# Altium PCB PowerBoard.PcbDoc (part 1 of 2)
Units mm, origin at the board's own origin, x right, y up, seen from the top; angles counter-clockwise.
Board outline 45 x 35 mm, 8 copper layers (Top Layer, Int1 (PGND), int2 (PWR_MOT), int3 (ALIM_MOT), int4 (+3.3VD), int5 (+3.3VA), Int6 (GNDA), Bottom Layer), stack 1.733 mm thick; 96 components, 64 nets, 341 pads, 448 vias.
Unrouted connection lines stored in the file: 117.
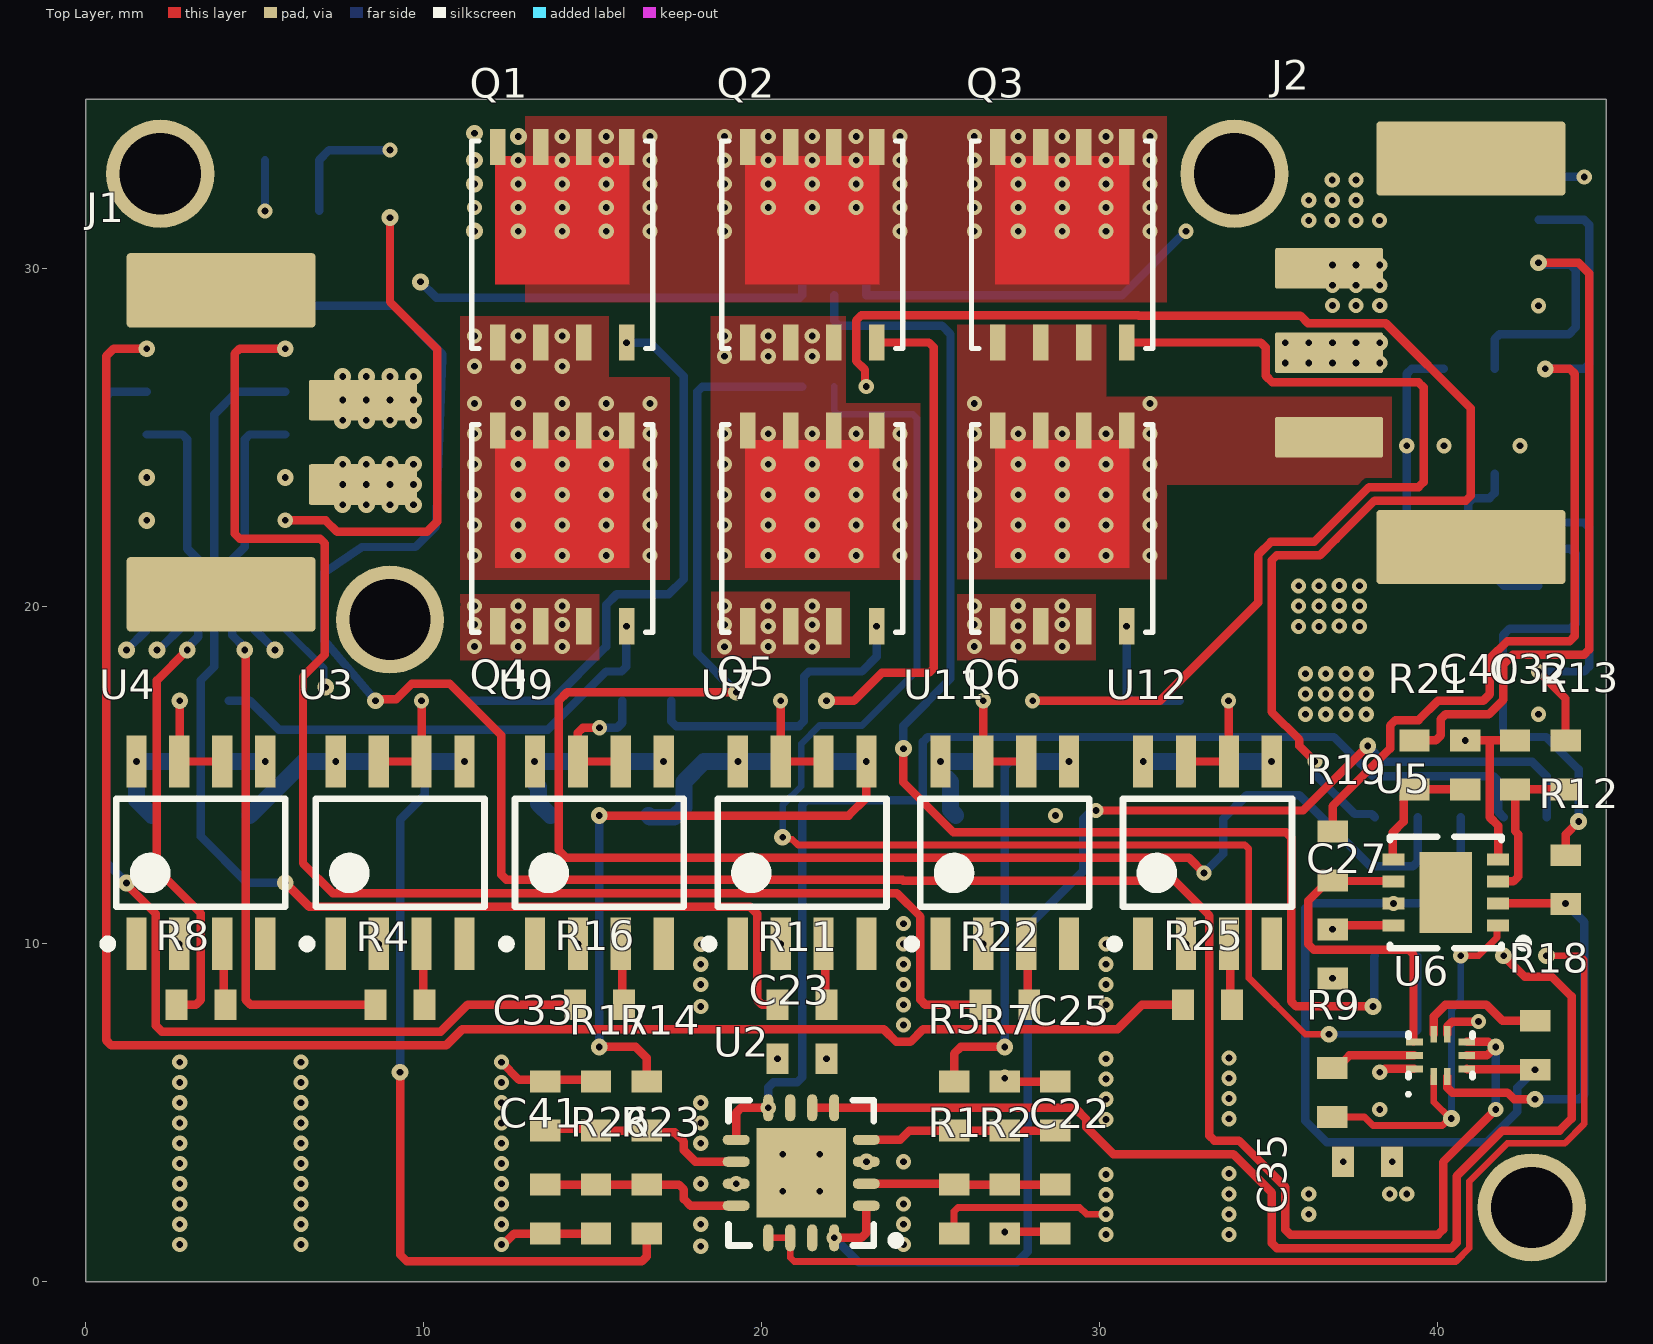
[diagram p0: Top Layer view]
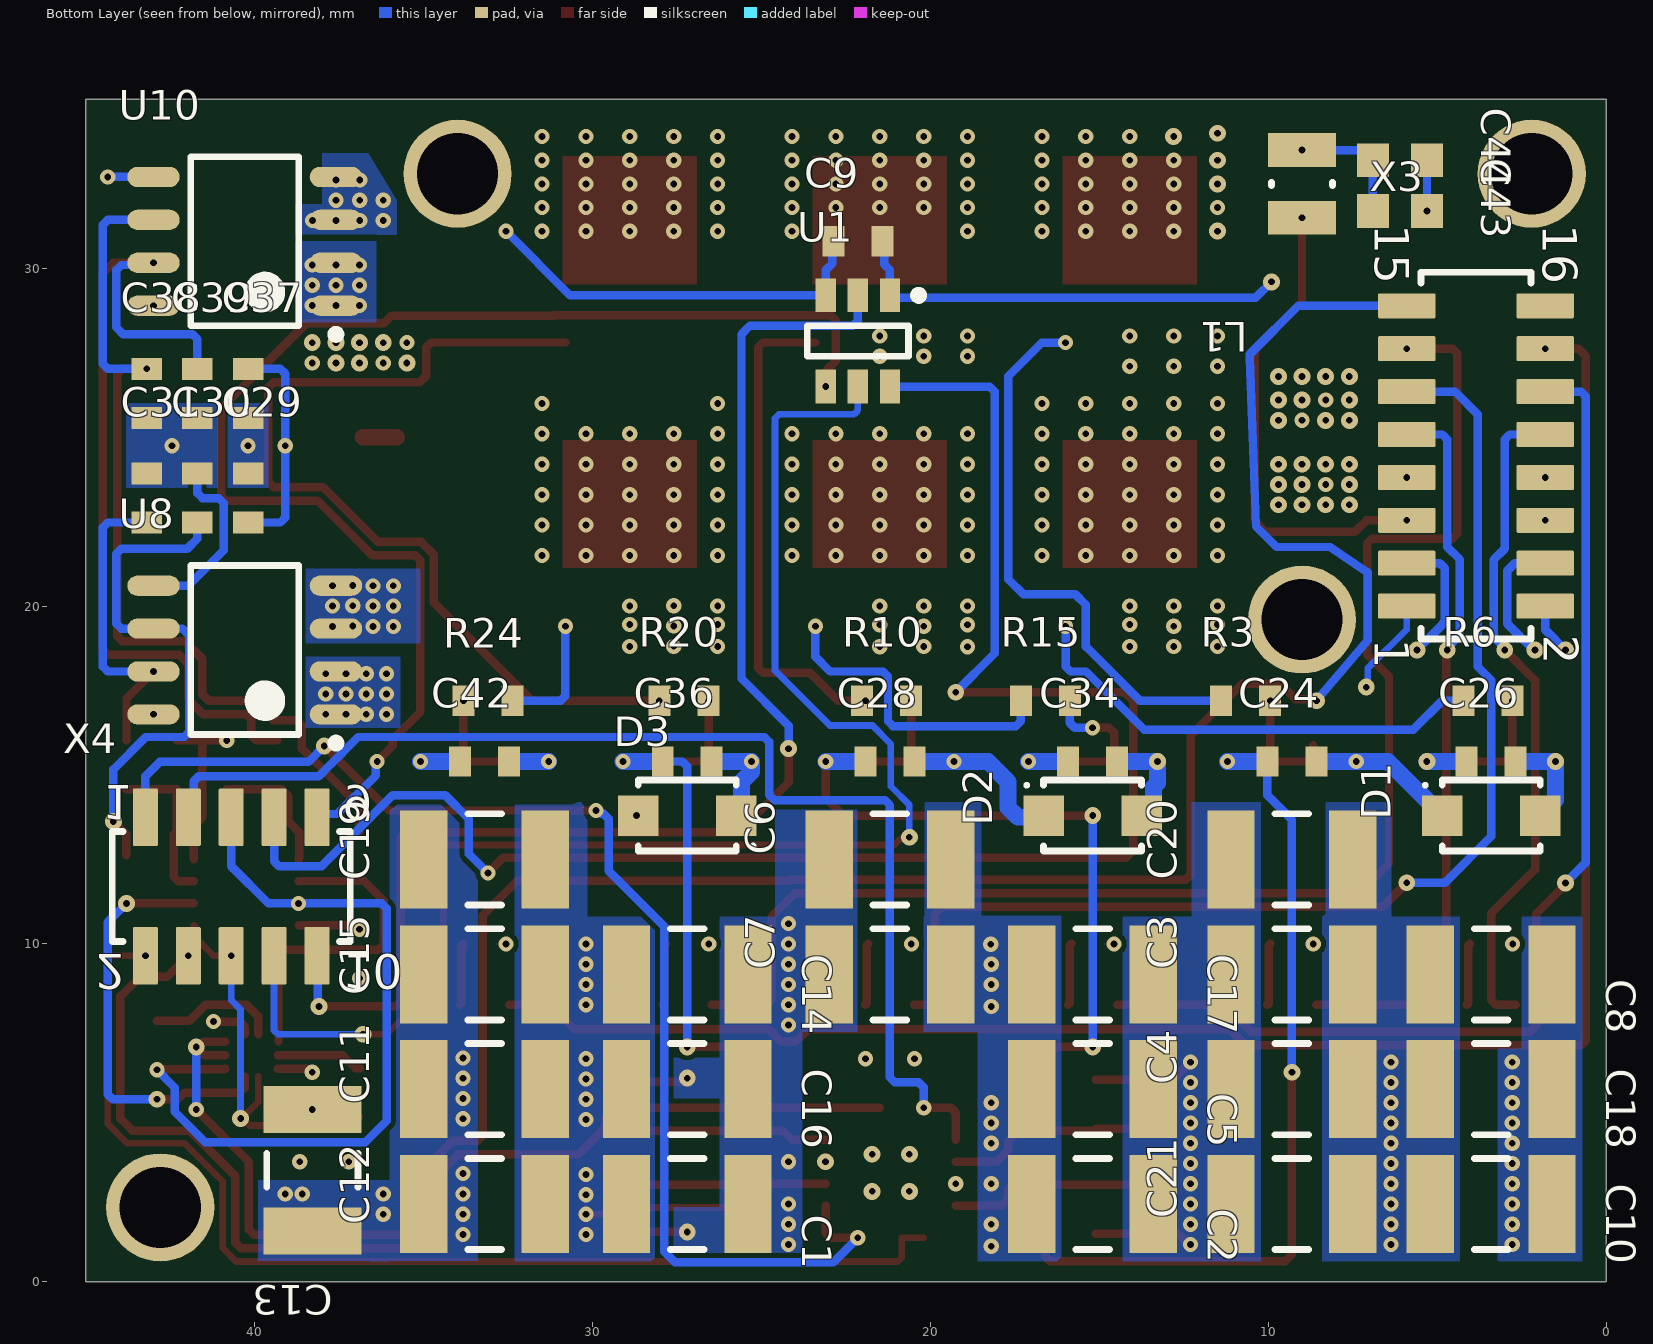
[diagram p1: Bottom Layer view, seen from below]
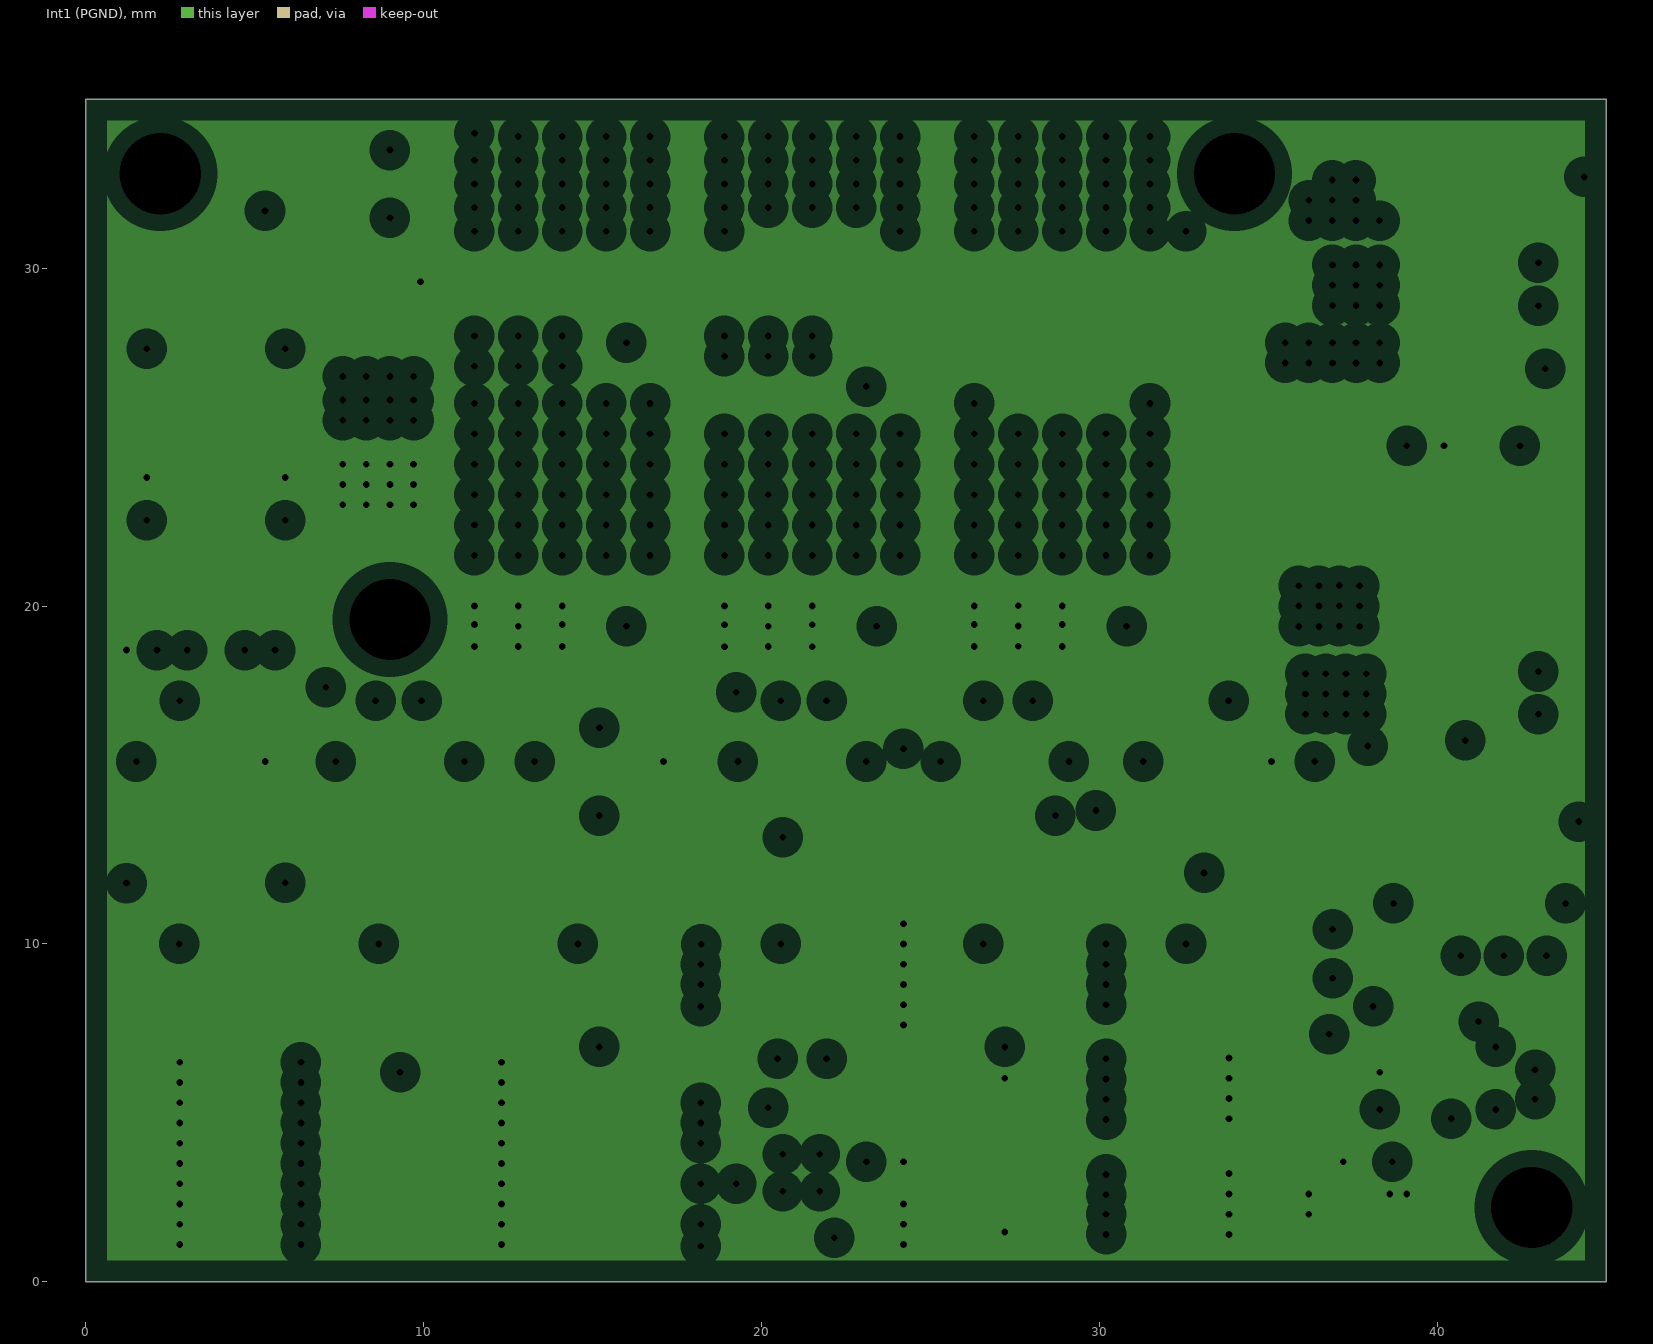
[diagram p2: Int1 (PGND), clearances drawn from the general rule]
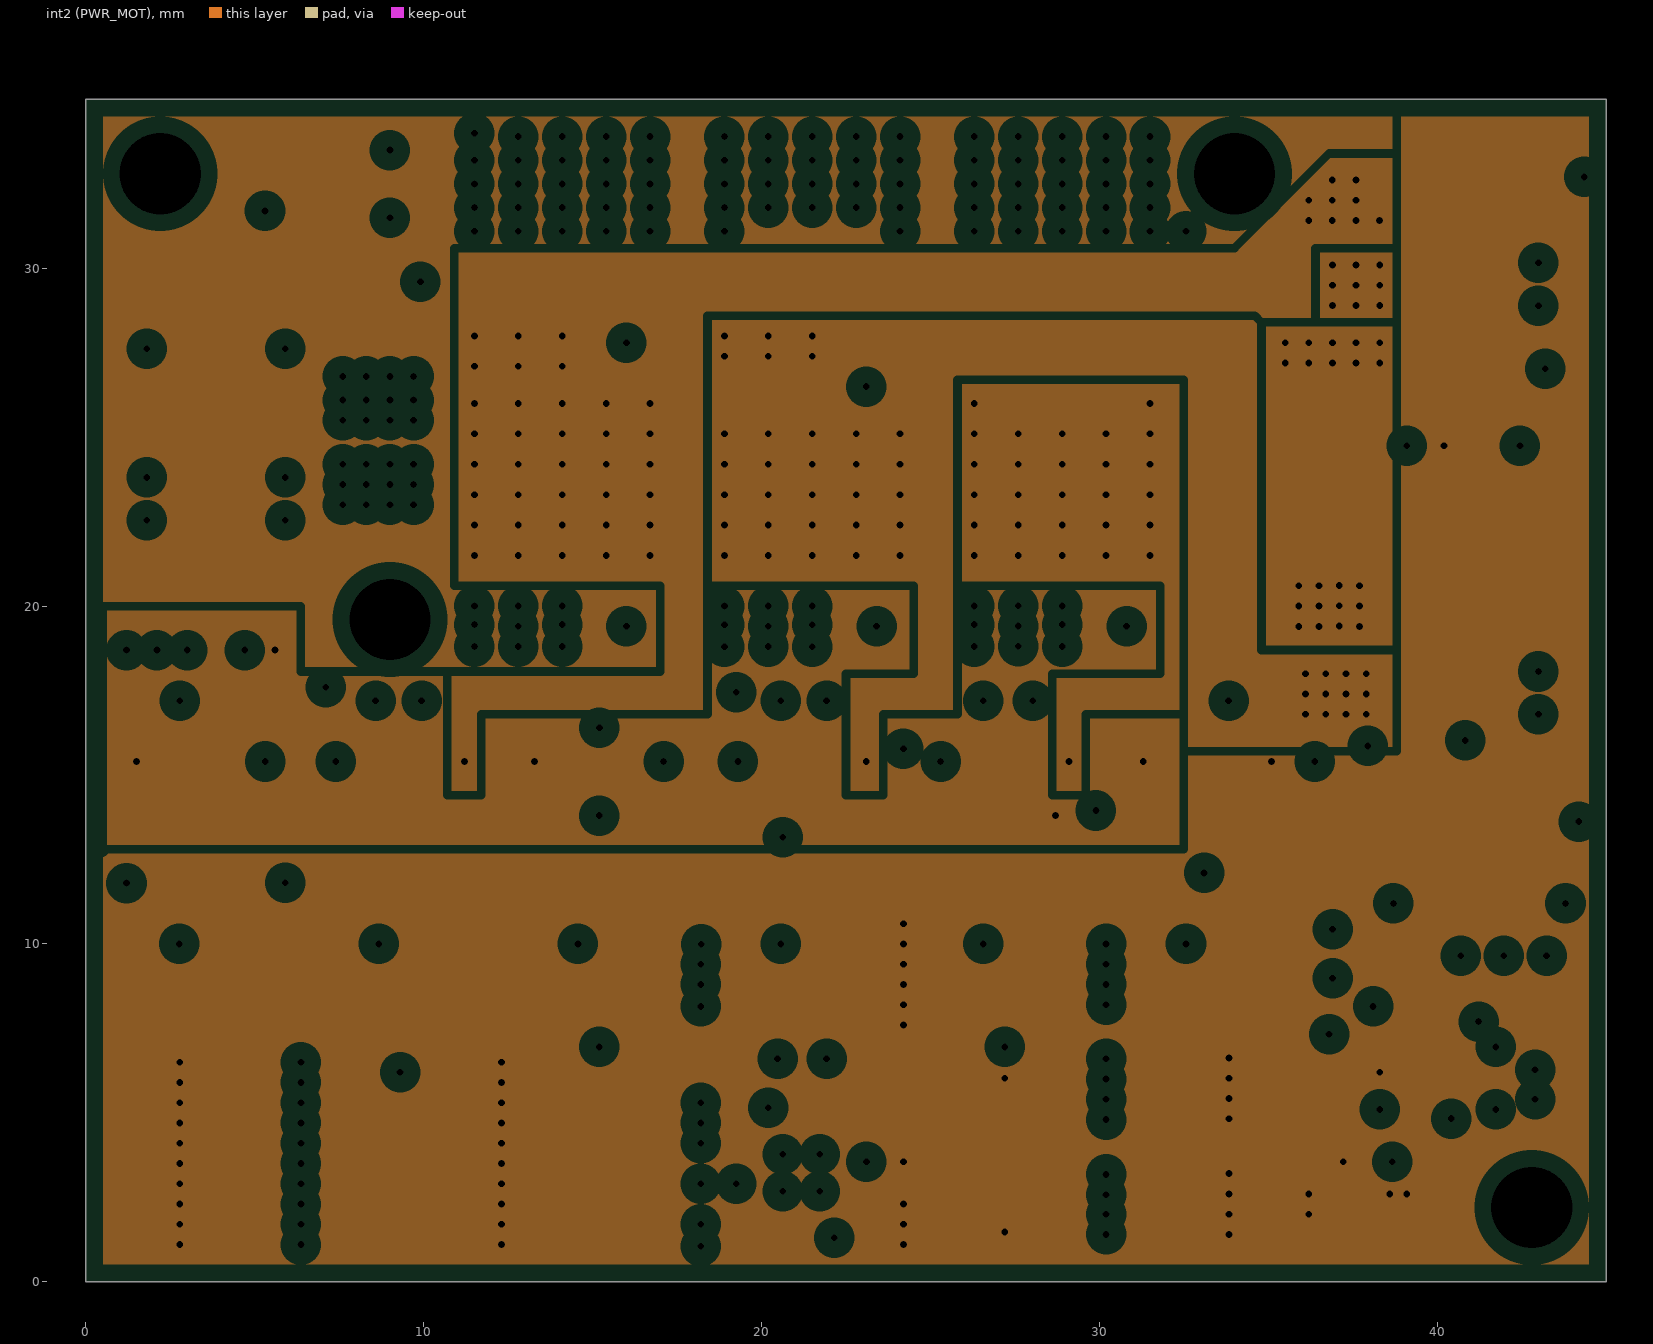
[diagram p3: int2 (PWR_MOT), clearances drawn from the general rule]
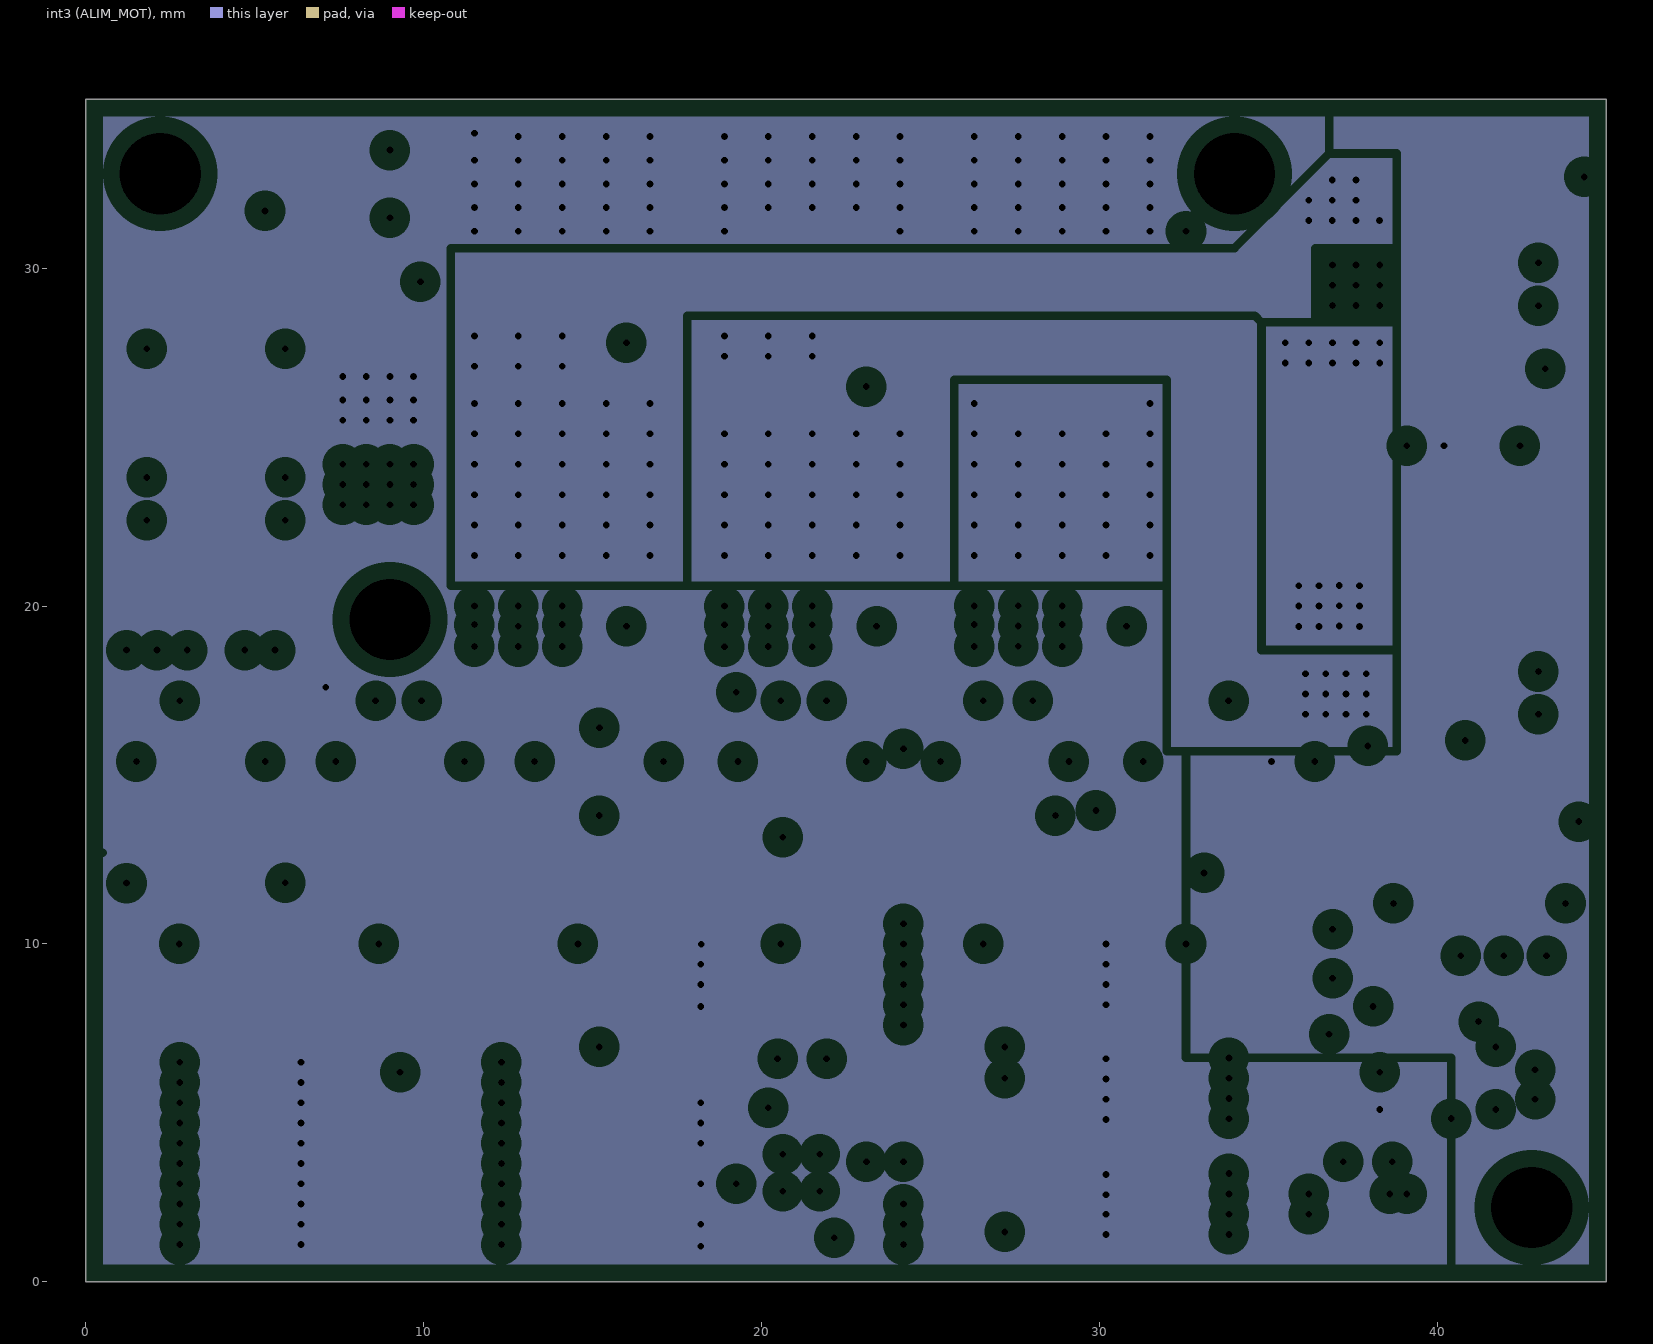
[diagram p4: int3 (ALIM_MOT), clearances drawn from the general rule]
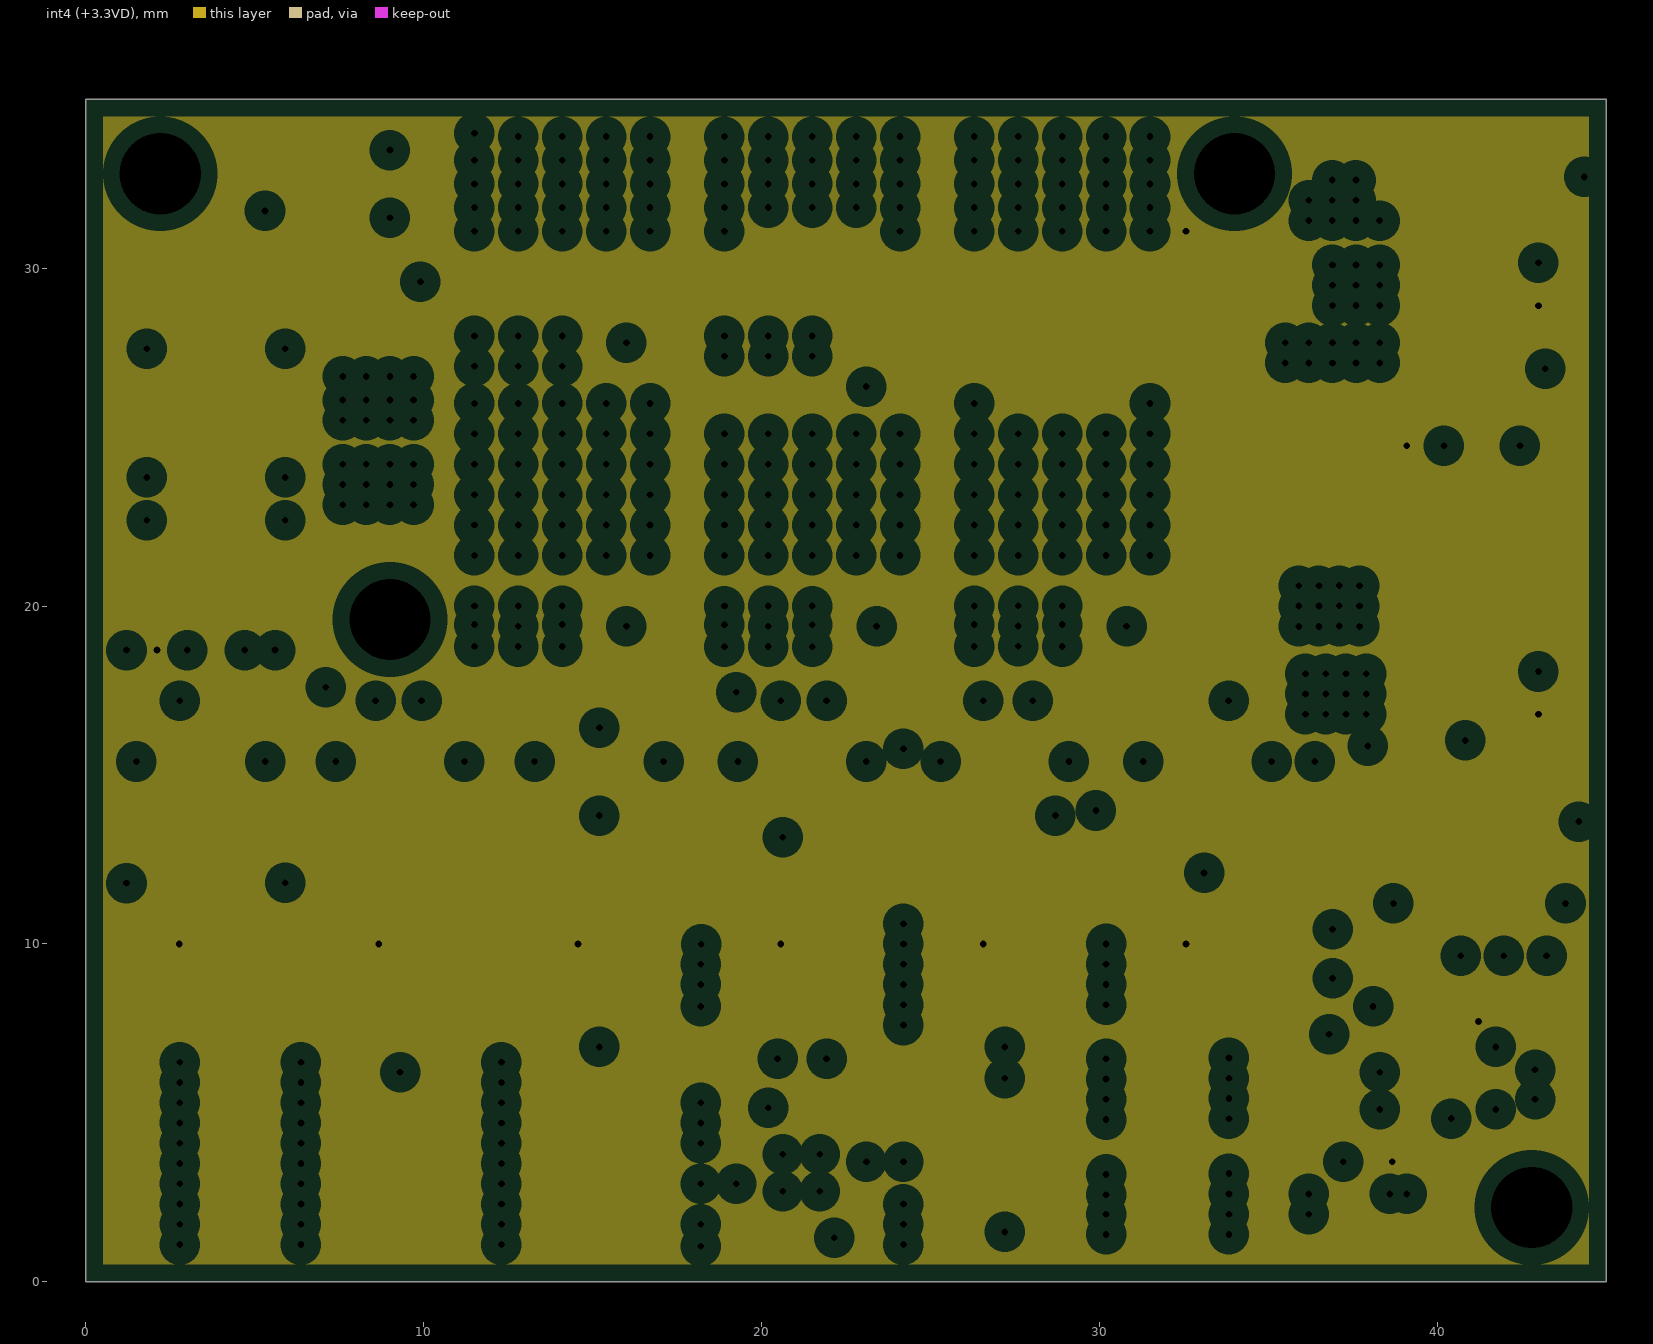
[diagram p5: int4 (+3.3VD), clearances drawn from the general rule]
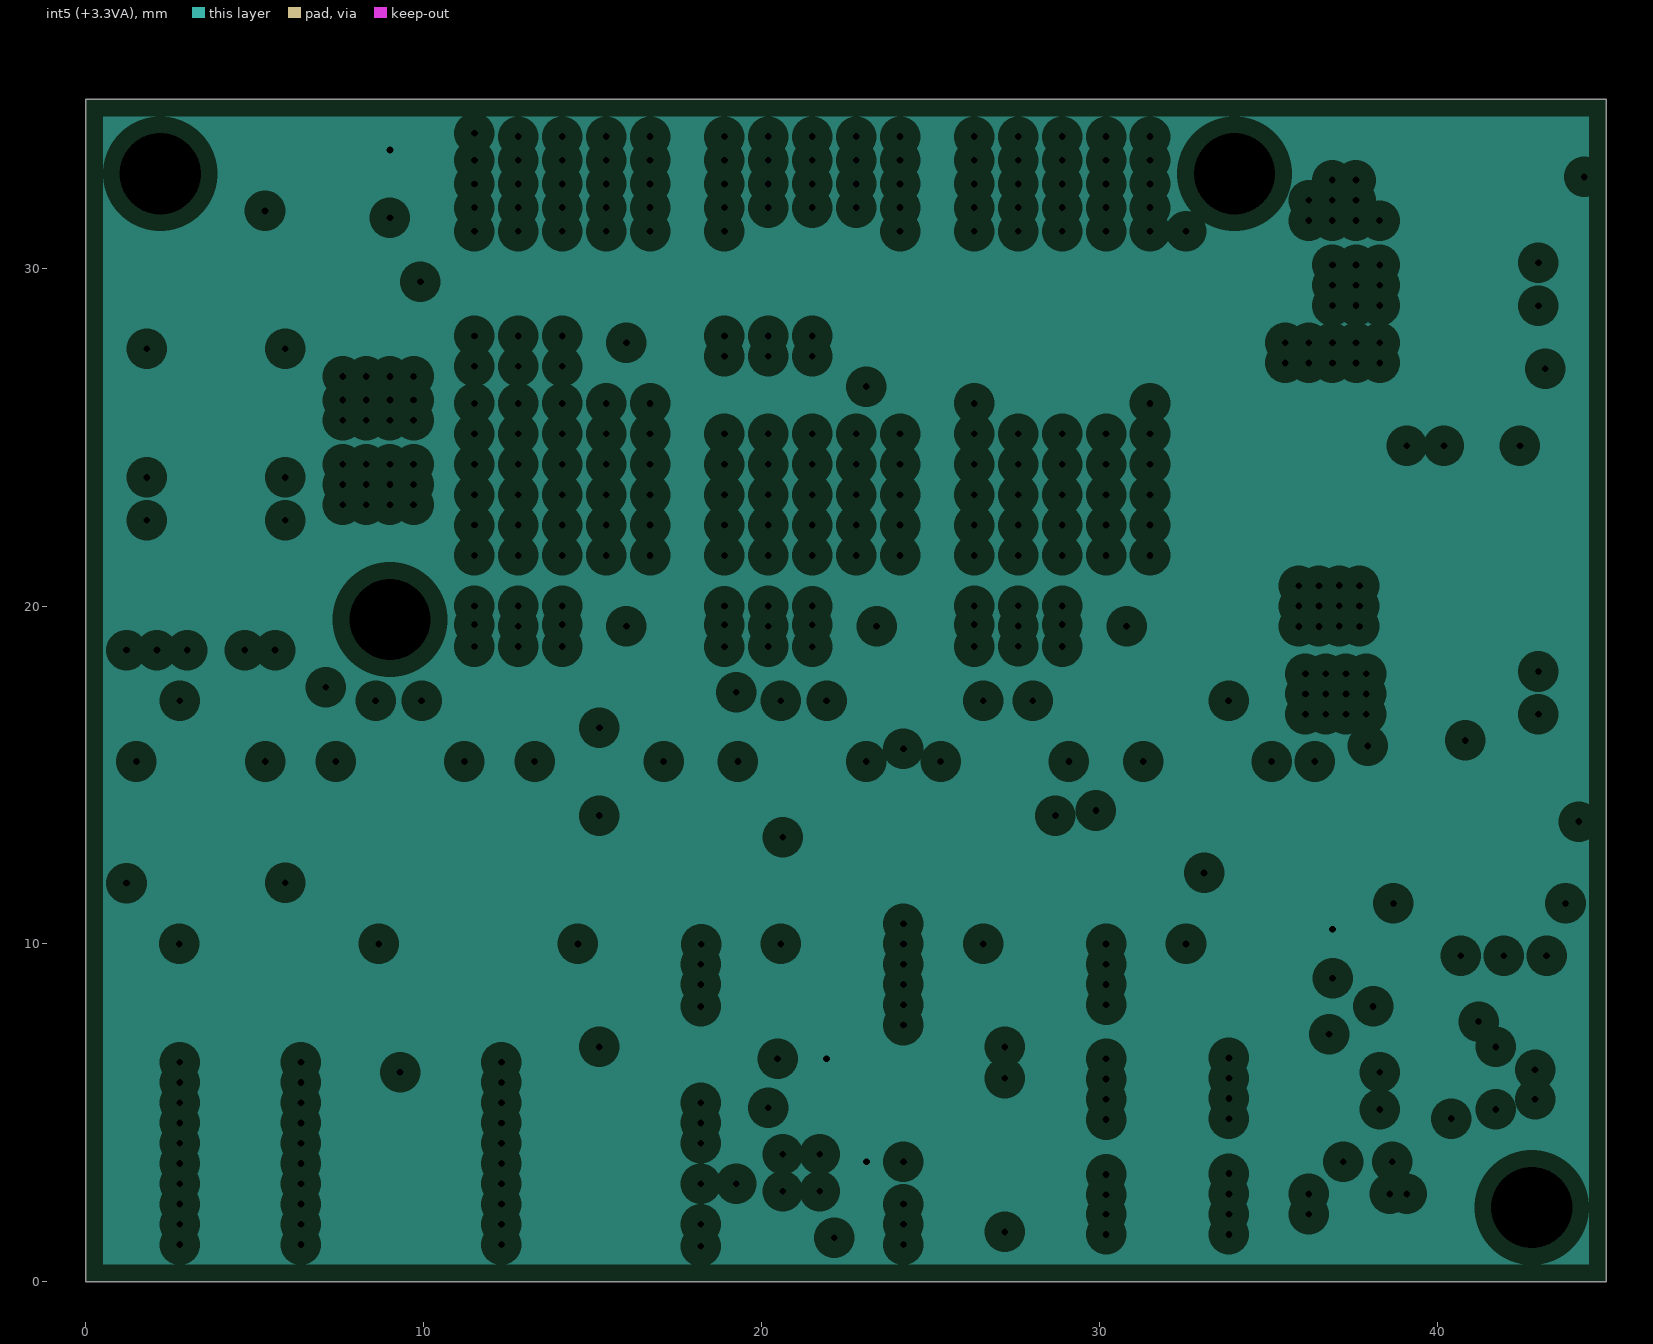
[diagram p6: int5 (+3.3VA), clearances drawn from the general rule]
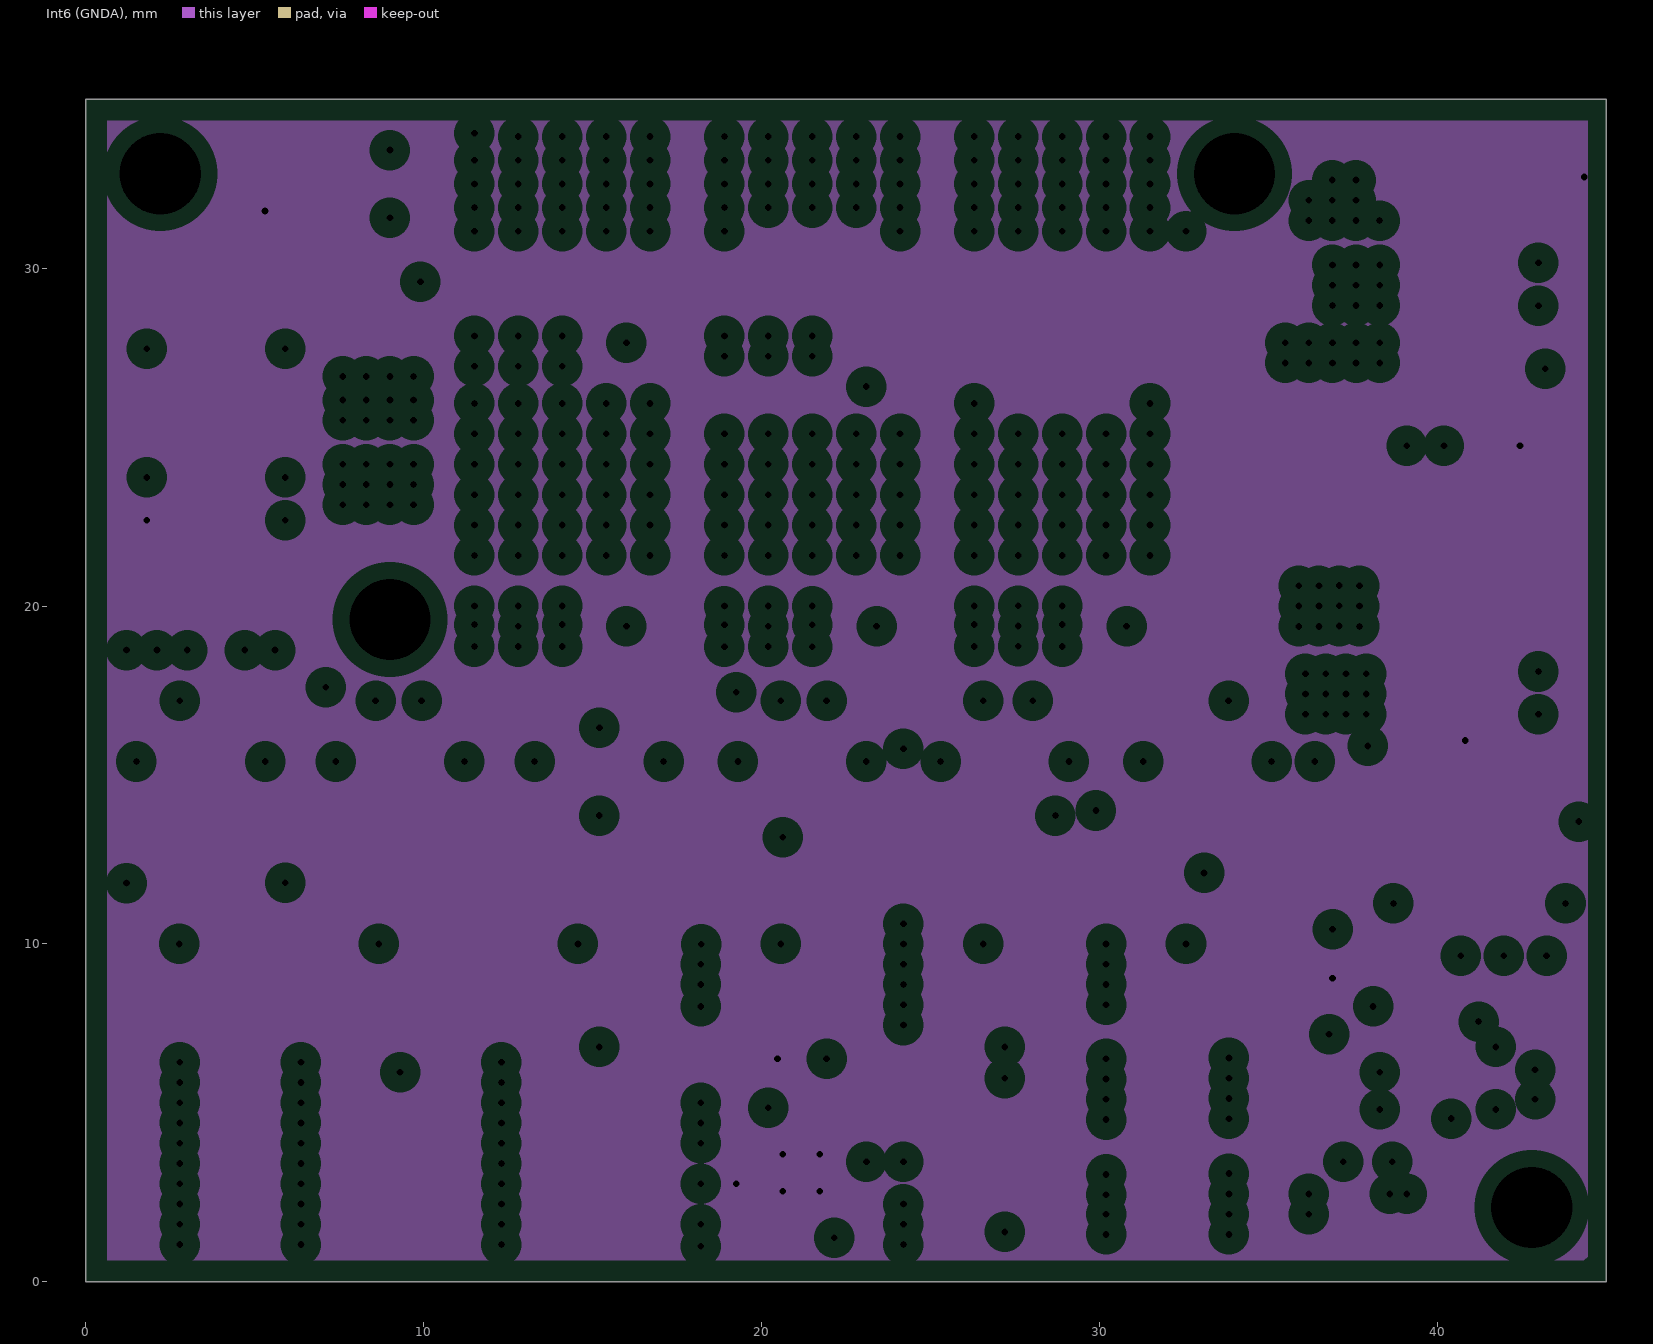
[diagram p7: Int6 (GNDA), clearances drawn from the general rule]
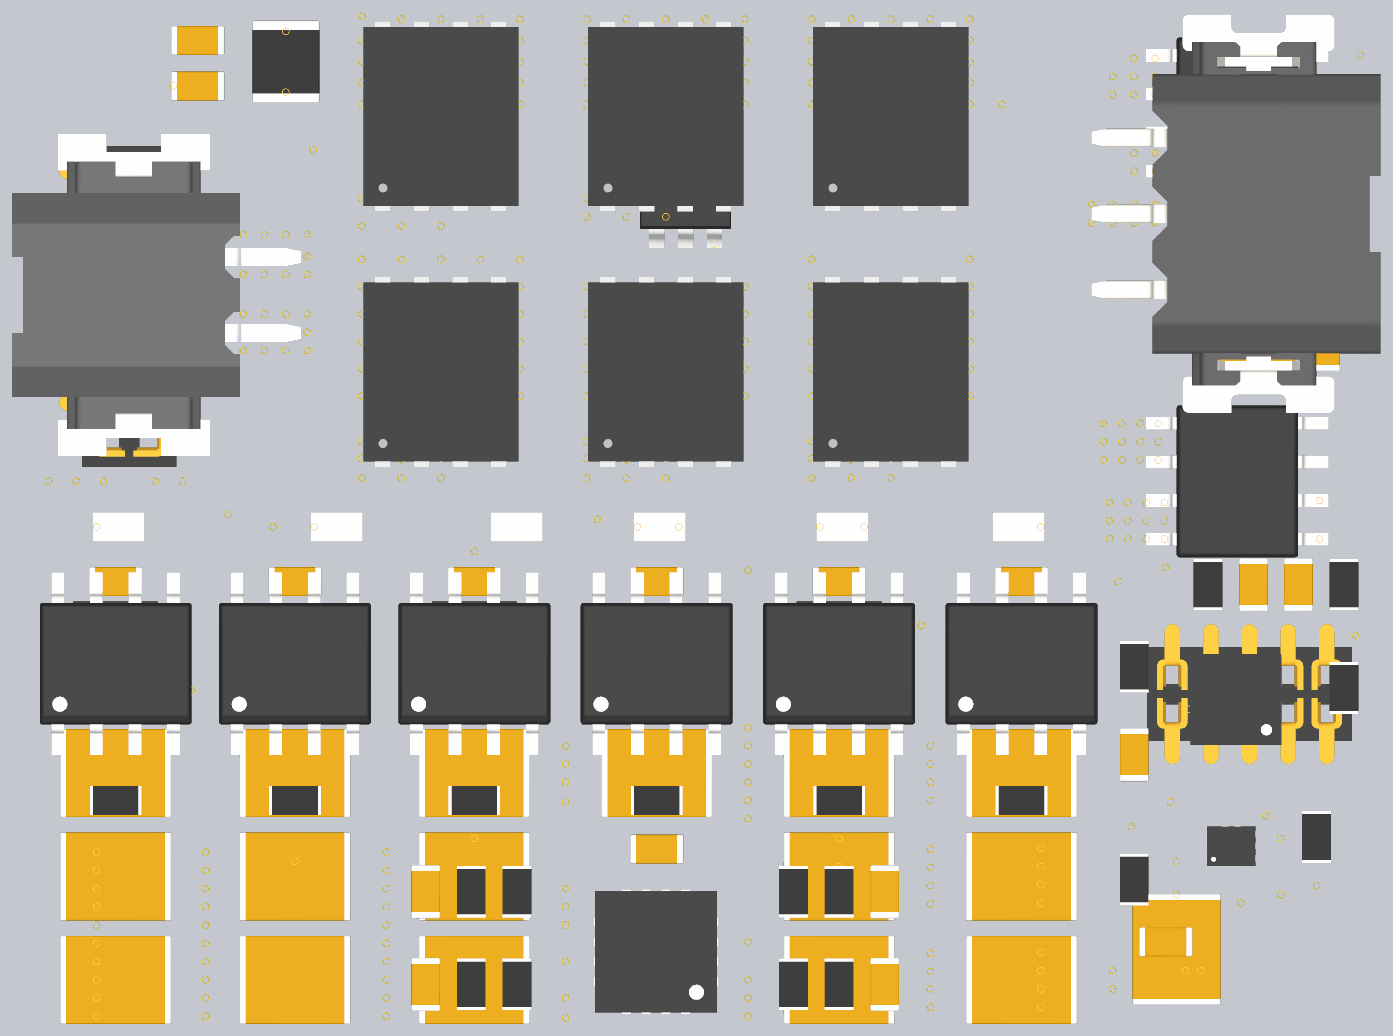
[diagram p9: 3D render of the assembled board from above, using the file's embedded part models]
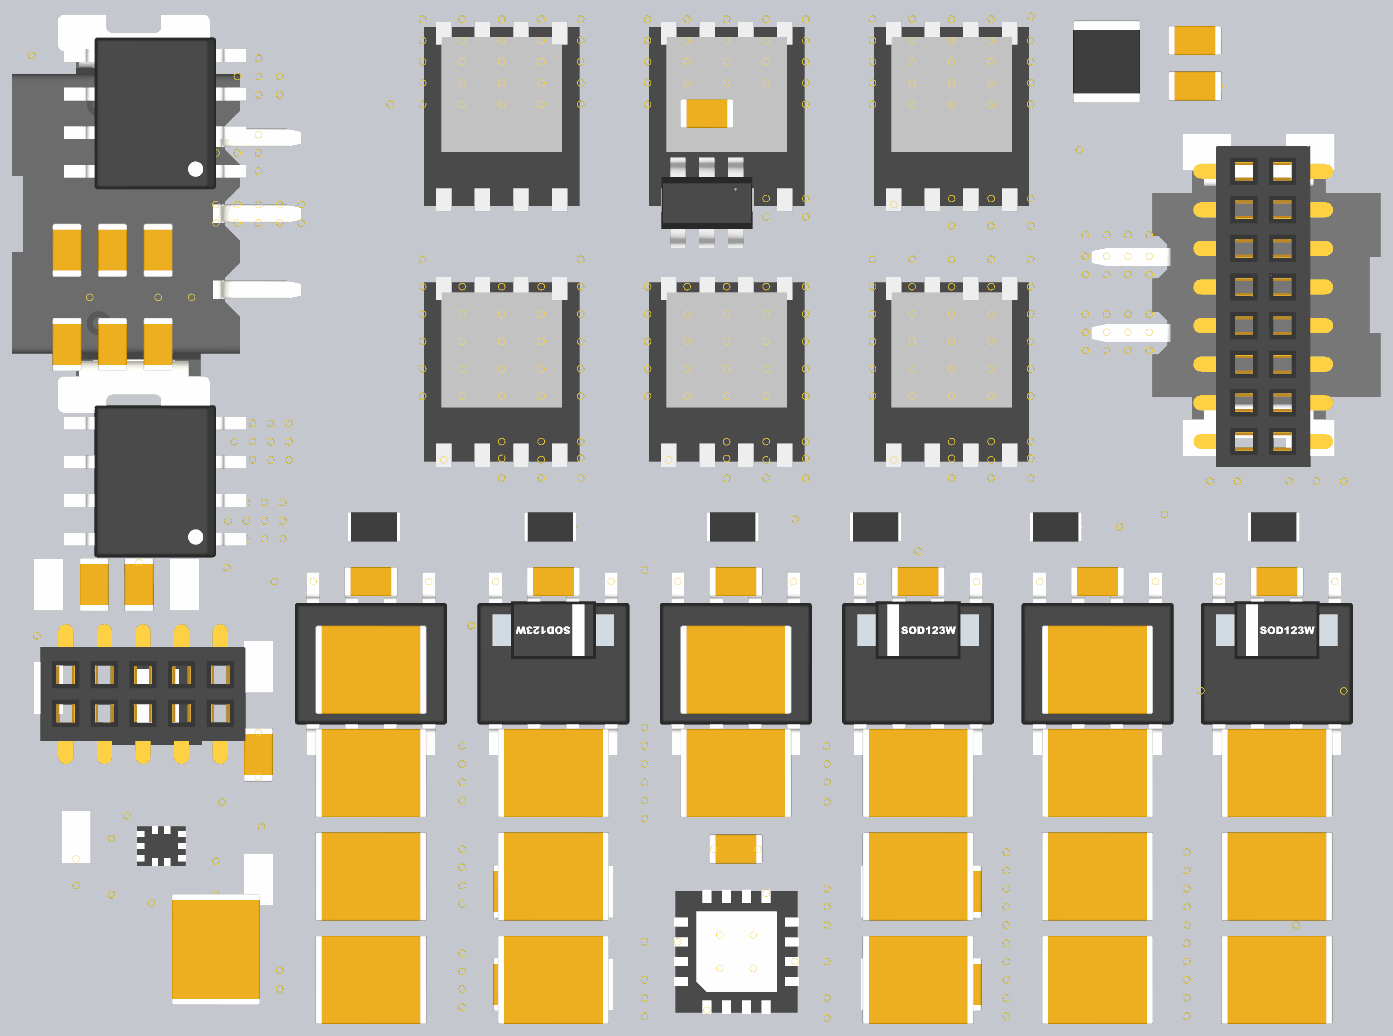
[diagram p10: 3D render of the assembled board from below, using the file's embedded part models]

## Layer stack, top to bottom
Top Solder: solder mask 0.0254, SM-001, Dk 4
Top Layer: signal copper 0.035
Dielectric 1: prepreg 0.0711, PP-006, Dk 4.1
Dielectric 2: prepreg 0.1168, PP-016, Dk 4.4
Int1 (PGND): plane copper 0.035, net DGND
Dielectric 3: core 0.2032, Core-024, Dk 4.6
int2 (PWR_MOT): plane copper 0.035, net DGND
Dielectric 4: prepreg 0.1168, PP-016, Dk 4.4
Dielectric 5: prepreg 0.1168, PP-016, Dk 4.4
int3 (ALIM_MOT): plane copper 0.035, net (Multiple Nets)
Dielectric 6: core 0.2032, Core-024, Dk 4.6
int4 (+3.3VD): plane copper 0.035, net +3.3VD
Dielectric 7: prepreg 0.1168, PP-016, Dk 4.4
Dielectric 8: prepreg 0.1168, PP-016, Dk 4.4
int5 (+3.3VA): plane copper 0.035, net +3.3VA
Dielectric 9: core 0.2032, Core-024, Dk 4.6
Int6 (GNDA): plane copper 0.035, net AGND
Dielectric 10: prepreg 0.1168, PP-016, Dk 4.4
Dielectric 11: prepreg 0.0711, PP-006, Dk 4.1
Bottom Layer: signal copper 0.035
Bottom Solder: solder mask 0.0254, SM-001, Dk 4

## Board outline
0,0 45,0 45,35 0,35

## Design rules (kind name [scope] priority, off if disabled: settings)
Clearance [All] p1: gap=0.15 ignorepadtopadclearanceinfootprint=TRUE except(0: Arc-Text Track-Text SMDPad-Text THPad-Text Via-Text Fill-Text Poly-Text Region-Text Text-Text Text-Hole)
HoleSize [All] p1: absolutevalues=TRUE maxlimit=3.5 minlimit=0.025 maxpercent=80.000 minpercent=20.000
MinimumSolderMaskSliver [All] p1: minsoldermaskwidth=0
PlaneClearance [All] p1: clearance=0.5
PlaneConnect MeasurePlane [InNetClass('MeasureClass')] p1: planeconnectstyle=Direct reliefexpansion=0.508 reliefentries=4 reliefconductorwidth=0.254 reliefairgap=0.254
PlaneConnect PowerPlane [InNetClass('PowerClass')] p2: planeconnectstyle=Direct reliefexpansion=0.508 reliefentries=4 reliefconductorwidth=0.254 reliefairgap=0.254
PlaneConnect [All] p3: planeconnectstyle=Relief reliefexpansion=0.508 reliefentries=4 reliefconductorwidth=0.254 reliefairgap=0.254
PolygonConnect MeasurePolygon [InNetClass('MeasureClass')] p1: connectstyle=Direct reliefconductorwidth=0.254 reliefentries=4 polygonreliefangle="90 Angle" airgapwidth=0.254
PolygonConnect PowerPolygon [InNetClass('PowerClass')] p2: connectstyle=Direct reliefconductorwidth=0.254 reliefentries=4 polygonreliefangle="90 Angle" airgapwidth=0.254
PolygonConnect [All] p3: connectstyle=Relief reliefconductorwidth=0.254 reliefentries=4 polygonreliefangle="90 Angle" airgapwidth=0.254
RoomDefinition "Power Electronic" [InComponentClass('Power Electronic')] p1: confinementstyle=ConfineIn formatcopy=TRUE lockcomponents=FALSE outline 0,0 45,0 45,35 0,35
RoomDefinition Powerboard [InComponentClass('Powerboard')] p2: confinementstyle=ConfineIn formatcopy=TRUE lockcomponents=FALSE outline 0,0 45,0 45,35 0,35
RoutingCorners [All] p1: cornerstyle=45-Degree minsetback=2.5 maxsetback=2.5
RoutingVias [All] p1: holewidth=0.2 width=0.5 viastyle="Through Hole" minholewidth=0.2 minwidth=0.5 maxholewidth=0.2 maxwidth=0.5
SilkToSilkClearance [not all] p1: silktosilkclearance=0.254
SilkToSolderMaskClearance [IsPad vs IsPad        or IsNet] p1: minsilkscreentomaskgap=0.06 clearancetoexposedcopper=TRUE
SolderMaskExpansion [All] p1: expansion=0.102 istentingtop=FALSE
ViasUnderSMD [All] p1: allowed=TRUE
Width PWMWidth [InNetClass('PWMClass')] p1: maxlimit=0.25 minlimit=0.25 preferedwidth=0.25 minimp=50.000000 maximp=50.000000 favimp=50.000000 checkconnectedcopper=TRUE
Width MeasureWidth [InNetClass('MeasureClass')] p2: maxlimit=0.25 minlimit=0.15 preferedwidth=0.2 minimp=50.000000 maximp=50.000000 favimp=50.000000 checkconnectedcopper=TRUE
Width [All] p3: maxlimit=0.5 minlimit=0.15 preferedwidth=0.2 checkconnectedcopper=TRUE
23 further rules are at their usual default settings.

## Classes and differential pairs
net class PWMClass: +3.3VD NetR4_1 NetR4_2 NetR8_1 NetR8_2 NetR11_1 NetR11_2 NetR16_1 NetR16_2 NetR22_1 NetR22_2 NetR25_1 NetR25_2 NetU3_1 NetU3_4 NetU4_1 NetU4_4 NetU7_1 NetU7_4 NetU9_1 NetU9_4 NetU11_1 NetU11_4 NetU12_1 NetU12_4
net class MeasureClass: +3.3VA +3.3VD AGND DGND GAIN_MES_I NetC22_2 NetC24_1 NetC25_2 NetC30_2 NetC31_2 NetC32_2 NetC33_2 NetC38_2 NetC39_2 NetC40_2 NetC41_2 NetJ2_1 NetJ2_2 NetR9_1 NetR9_2 NetR12_2 NetR18_1 NetR18_2 NetR19_2 NetU1_2 NetU1_4 NetU1_5 NetU1_6 NetU2_1 NetU2_5 NetU2_7 NetU2_8 NetU2_13 NetU2_15 "Phase V" "Phase W" VP
component class PowerBoard: J1 J2 X3 X4
net class PowerClass: DGND NetC24_1 NetJ2_1 NetJ2_2 "Phase V" "Phase W" VP

## Components (designator, comment, footprint, x,y, rotation, side; value= is the part's Value field where it differs from the comment)
C1 "CAP CER 10uF 1210" CAPC3226X25N 27.2,2.3 r0 bottom value=10uF
C2 "CAP CER 10uF 1210" CAPC3226X25N 15.2,2.3 r0 bottom value=10uF
C3 "CAP CER 10uF 1210" CAPC3226X25N 9.3,9.1 r180 bottom value=10uF
C4 "CAP CER 10uF 1210" CAPC3226X25N 9.3,5.7 r180 bottom value=10uF
C5 "CAP CER 10uF 1210" CAPC3226X25N 15.2,5.7 r0 bottom value=10uF
C6 "CAP CER 10uF 1210" CAPC3226X25N 21.2,12.5 r180 bottom value=10uF
C7 "CAP CER 10uF 1210" CAPC3226X25N 21.2,9.1 r180 bottom value=10uF
C8 "CAP CER 10uF 1210" CAPC3226X25N 3.4,9.1 r0 bottom value=10uF
C9 "CAP CER 100nF 0603" CAPC1608X08N#1 22.15,30.8 r0 bottom value=100nF
C10 "CAP CER 10uF 1210" CAPC3226X25N 3.4,2.3 r0 bottom value=10uF
C11 "CAP CER 10uF 1210" CAPC3226X25N 33.2,5.7 r180 bottom value=10uF
C12 "CAP CER 10uF 1210" CAPC3226X25N 33.2,2.3 r180 bottom value=10uF
C13 "CAP CER 10uF 1210" CAPC3226X25N 38.3,3.3 r90 bottom value=10uF
C14 "CAP CER 10uF 1210" CAPC3226X25N 27.2,9.1 r0 bottom value=10uF
C15 "CAP CER 10uF 1210" CAPC3226X25N 33.2,9.1 r180 bottom value=10uF
C16 "CAP CER 10uF 1210" CAPC3226X25N 27.2,5.7 r0 bottom value=10uF
C17 "CAP CER 10uF 1210" CAPC3226X25N 15.2,9.1 r0 bottom value=10uF
C18 "CAP CER 10uF 1210" CAPC3226X25N 3.4,5.7 r0 bottom value=10uF
C19 "CAP CER 10uF 1210" CAPC3226X25N 33.2,12.5 r180 bottom value=10uF
C20 "CAP CER 10uF 1210" CAPC3226X25N 9.3,12.5 r180 bottom value=10uF
C21 "CAP CER 10uF 1210" CAPC3226X25N 9.3,2.3 r180 bottom value=10uF
C22 "CAP CER 1nF 0603" CAPC1608X08N#1 28.7,2.15 r90 top value=1nF
C23 "CAP CER 100nF 0603" CAPC1608X08N#1 21.2,6.6 r0 top value=100nF
C24 "CAP CER 1uF 0603" CAPC1608X08N#1 9.3,15.4 r180 bottom value=1uF
C25 "CAP CER 1nF 0603" CAPC1608X08N#1 28.7,5.2 r270 top value=1nF
C26 "CAP CER 1uF 0603" CAPC1608X08N#1 3.4,15.4 r180 bottom value=1uF
C27 "CAP CER 100nF 0603" CAPC1608X08N#1 36.906,9.707 r90 top value=100nF
C28 "CAP CER 1uF 0603" CAPC1608X08N#1 21.2,15.4 r180 bottom value=1uF
C29 "CAP CER 47nF 0603" CAPC1608X08N#1 40.2,23.2 r270 bottom value=47nF
C30 "CAP CER 4.7nF 0603" CAPC1608X08N#1 41.7,23.2 r270 bottom value=4,7nF
C31 "CAP CER 47nF 0603" CAPC1608X08N#1 43.2,23.2 r270 bottom value=47nF
C32 "CAP CER 1nF 0603" CAPC1608X08N#1 42.306,15.3 r270 top value=1nF
C33 "CAP CER 1nF 0603" CAPC1608X08N#1 13.6,5.2 r270 top value=1nF
C34 "CAP CER 1uF 0603" CAPC1608X08N#1 15.2,15.4 r180 bottom value=1uF
C35 "CAP CER 100nF 0603" CAPC1608X08N#1 37.944,3.55 r0 top value=100nF
C36 "CAP CER 1uF 0603" CAPC1608X08N#1 27.2,15.4 r180 bottom value=1uF
C37 "CAP CER 47nF 0603" CAPC1608X08N#1 40.2,26.3 r90 bottom value=47nF
C38 "CAP CER 4.7nF 0603" CAPC1608X08N#1 43.2,26.3 r90 bottom value=4,7nF
C39 "CAP CER 47nF 0603" CAPC1608X08N#1 41.7,26.3 r90 bottom value=47nF
C40 "CAP CER 1nF 0603" CAPC1608X08N#1 40.831,15.3 r270 top value=1nF
C41 "CAP CER 1nF 0603" CAPC1608X08N#1 13.6,2.15 r90 top value=1nF
C42 "CAP CER 1uF 0603" CAPC1608X08N#1 33.2,15.4 r180 bottom value=1uF
C43 "CAP CER 22uF 0603" CAPC1608X08N#2 6.1,31.7 r0 bottom value=22uF
C44 "CAP CER 22uF 0603" CAPC1608X08N#2 6.1,33.2 r0 bottom value=22uF
D1 "DIODE SCHOTTKY 100V 1A SOD123" DIOM2617X11N 3.4,13.8 r180 bottom value=PMEG10010ELRX
D2 "DIODE SCHOTTKY 100V 1A SOD123" DIOM2617X11N 15.2,13.8 r180 bottom value=PMEG10010ELRX
D3 "DIODE SCHOTTKY 100V 1A SOD123" DIOM2617X11N 27.2,13.8 r0 bottom value=PMEG10010ELRX
J1 "CONNECT 2pos 90°" CONNECT2PIN 8.2,26.1 r90 top value=WR-TBL322
J2 "CONNECT 3pos 90°" CONNECT3PIN 36.8,27.5 r270 top value=WR-TBL322
L1 "IND SMD 220nH 1008" INDC2520X10N 9,32.5 r90 bottom value=220nH
Q1 "MOSFET N-CH 80V" DFN8_506EG_ONS 14.1,30.7 r90 top value=NTMFSC004N08MC
Q2 "MOSFET N-CH 80V" DFN8_506EG_ONS 21.5,30.7 r90 top value=NTMFSC004N08MC
Q3 "MOSFET N-CH 80V" DFN8_506EG_ONS 28.9,30.7 r90 top value=NTMFSC004N08MC
Q4 "MOSFET N-CH 80V" DFN8_506EG_ONS 14.1,22.3 r90 top value=NTMFSC004N08MC
Q5 "MOSFET N-CH 80V" DFN8_506EG_ONS 21.5,22.3 r90 top value=NTMFSC004N08MC
Q6 "MOSFET N-CH 80V" DFN8_506EG_ONS 28.9,22.3 r90 top value=NTMFSC004N08MC
R1 "RES 18K SMD 0603" RESC1508X04N 25.7,2.15 r90 top value=18k
R2 "RES 1K SMD 0603" RESC1508X04N 27.2,2.15 r90 top value=1k
R3 "RES 5R6 SMD 0603" RESC1508X04N 10.675,17.2 r0 bottom value=5,6R
R4 "RES 220R SMD 0603" RESC1508X04N 9.3,8.2 r0 top value=220R
R5 "RES 18K SMD 0603" RESC1508X04N 25.7,5.2 r270 top value=18k
R6 "RES 5R6 SMD 0603" RESC1508X04N 3.5,17.2 r0 bottom value=5,6R
R7 "RES 1K SMD 0603" RESC1508X04N 27.2,5.2 r270 top value=1k
R8 "RES 220R SMD 0603" RESC1508X04N 3.4,8.2 r0 top value=220R
R9 "RES 20k SMD 0603" RESC1508X04N 36.9,5.6 r270 top value=20k
R10 "RES 5R6 SMD 0603" RESC1508X04N 21.3,17.2 r0 bottom value=5,6R
R11 "RES 220R SMD 0603" RESC1508X04N 21.2,8.2 r0 top value=220R
R12 "RES 10K SMD 0603" RESC1508X04N 43.806,11.9 r270 top value=10k
R13 "RES 1K SMD 0603" RESC1508X04N 43.806,15.3 r270 top value=1k
R14 "RES 18K SMD 0603" RESC1508X04N 16.6,5.2 r270 top value=18k
R15 "RES 5R6 SMD 0603" RESC1508X04N 16.6,17.2 r0 bottom value=5,6R
R16 "RES 220R SMD 0603" RESC1508X04N 15.2,8.2 r0 top value=220R
R17 "RES 1K SMD 0603" RESC1508X04N 15.1,5.2 r270 top value=1k
R18 "RES 20k SMD 0603" RESC1508X04N 42.9,7 r270 top value=20k
R19 "RES 10K SMD 0603" RESC1508X04N 36.906,12.6 r270 top value=10k
R20 "RES 5R6 SMD 0603" RESC1508X04N 27.3,17.2 r0 bottom value=5,6R
R21 "RES 1K SMD 0603" RESC1508X04N 39.331,15.3 r270 top value=1k
R22 "RES 220R SMD 0603" RESC1508X04N 27.2,8.2 r0 top value=220R
R23 "RES 18K SMD 0603" RESC1508X04N 16.6,2.15 r90 top value=18k
R24 "RES 5R6 SMD 0603" RESC1508X04N 33.1,17.2 r180 bottom value=5,6R
R25 "RES 220R SMD 0603" RESC1508X04N 33.2,8.2 r0 top value=220R
R26 "RES 1K SMD 0603" RESC1508X04N 15.1,2.15 r90 top value=1k
U1 "SENSOR DIGITAL -40C-150C" SOT95P280X145-6N 22.15,27.85 r270 bottom value=ADT7301
U2 "Op Amp 4ch" QFN65P400X400X100_HS-17N 21.175,3.225 r180 top value=MCP629
U3 "GATE DRIVER 2.5A" SOIC127P600X175-8N 9.3,12.7 r90 top value=SI8220BB-D
U4 "GATE DRIVER 2.5A" SOIC127P600X175-8N 3.4,12.7 r90 top value=SI8220BB-D
U5 "Op Amp 2ch" QFN65P300X300X100_HS-9N 40.256,11.525 r180 top value=MCP622
U6 "Analog Switch 2:1 2ch" QFN40P130X160X60-10N 40.1,6.7 r90 top value=ADG854BCPZ
U7 "GATE DRIVER 2.5A" SOIC127P600X175-8N 21.2,12.7 r90 top value=SI8220BB-D
U8 "IC CURRENT SENSOR" SOIC127P600X173-8N 40.3,18.7 r0 bottom value=MLX91221
U9 "GATE DRIVER 2.5A" SOIC127P600X175-8N 15.2,12.7 r90 top value=SI8220BB-D
U10 "IC CURRENT SENSOR" SOIC127P600X173-8N 40.3,30.8 r0 bottom value=MLX91221
U11 "GATE DRIVER 2.5A" SOIC127P600X175-8N 27.2,12.7 r90 top value=SI8220BB-D
U12 "GATE DRIVER 2.5A" SOIC127P600X175-8N 33.2,12.7 r90 top value=SI8220BB-D
X3 "CONNECT SMD 16pos 2row 180°" 62301621021 3.85,24.455 r270 bottom value=62301621021
X4 "CONNECT SMD 10pos 2row 180°" 62301021021 40.7,11.7 r0 bottom value=62301021021

## Footprints (in the part's own frame and the unit in brackets; to place one, negate y for a bottom-side part, rotate by r counter-clockwise, add the part's x,y. Pads: shape width x height; smd on the part's side, far side on the other; paste and mask are expansions set on the pad)
62301021021 [mm] "Socket Header, Pitch 1.27 mm, SMT, Vertical, dual row, 10p"
  rrect10% 0.74x1.7 smd: 1(2.54,-2.05) 2(2.54,2.05) 3(1.27,-2.05) 4(1.27,2.05) 5(0,-2.05) 6(0,2.05) 7(-1.27,-2.05) 8(-1.27,2.05) 9(-2.54,-2.05) 10(-2.54,2.05)
  silkscreen extent -3.53,-1.63 3.53,1.63, body extent -3.37,-2.3 3.38,2.3, height 4.6
62301621021 [mm] "Socket Header, Pitch 1.27 mm, SMT, Vertical, dual row, 16p"
  rrect10% 0.74x1.7 smd: 1(4.455,-2.05) 2(4.455,2.05) 3(3.185,-2.05) 4(3.185,2.05) 5(1.915,-2.05) 6(1.915,2.05) 7(0.645,-2.05) 8(0.645,2.05) 9(-0.625,-2.05) 10(-0.625,2.05) 11(-1.895,-2.05) 12(-1.895,2.05) 13(-3.165,-2.05) 14(-3.165,2.05) 15(-4.435,-2.05) 16(-4.435,2.05)
  silkscreen extent -5.43,-1.63 5.43,1.63, body extent -5.28,-2.3 5.28,2.3, height 4.6
CAPC1608X08N#1 [mm] "Chip Capacitor, 2-Leads, Body 1.60x0.80mm, IPC Medium Density"
  rect 0.65x0.9 smd: 1(-0.725,0) 2(0.725,0)
  body extent -0.87,-0.48 0.87,0.48, height 0.8
CAPC1608X08N#2 [mm] "Chip Capacitor, 2-Leads, Body 1.60x0.80mm, IPC Medium Density"
  rect 0.95x1 smd: 1(-0.8,0) 2(0.8,0)
  body extent -0.87,-0.48 0.87,0.48, height 0.8
CAPC3226X25N [mm] "Chip Capacitor, 2-Leads, Body 3.22x2.55mm, IPC Medium Density"
  rect 1.4x2.9 smd: 1(-1.8,0) 2(1.8,0)
  silkscreen extent -0.5,-1.35 0.5,1.35, body extent -1.83,-1.45 1.83,1.45, height 2.5
CONNECT2PIN [mm]
  rrect10% 1.2x3.2 smd: 1(-2.5,0) 2(0,0)
  rrect10% 2.2x5.6 smd: 4(-5.75,4.2) 5(3.25,4.2)
  body extent -6.57,-1.3 4.02,8.2, height 5
CONNECT3PIN [mm]
  rrect10% 1.2x3.2 smd: 1(-2.5,0) 2(0,0) 3(2.5,0)
  rrect10% 2.2x5.6 smd: 4(-5.75,4.2) 5(5.75,4.2)
  body extent -6.55,-1.3 6.55,8.2, height 5
DFN8_506EG_ONS [mil]
  rect 42x18 smd paste+0 mask+0: 1(-114,75) 2(-114,25) 3(-114,-25) 4(-114,-75) 5(114,-75) 6(114,-25) 7(114,25) 8(114,75)
  Top Layer region: 103,-78 103,78 -46,78 -46,-78
  silkscreen extent -121,-105 121,106, body extent -123,-101 123,101, height 39
DIOM2617X11N [mm] "Molded Diode, 2-Leads, Body 2.60x1.70mm, IPC Medium Density"
  rect 1.2x1.2 smd: 1(-1.45,0) 2(1.45,0)
  silkscreen extent -2,-1.05 1.45,1.05, body extent -2,-0.95 2,0.95, height 1.1
INDC2520X10N [mm] "Chip Inductor, 2-Leads, Body 2.50x2.00mm, IPC Medium Density"
  rect 1x2 smd: 1(-1,0) 2(1,0)
  silkscreen extent -0.05,-0.9 0.05,0.9, body extent -1.35,-1.1 1.35,1.1, height 1
QFN40P130X160X60-10N [mm] "QFN, 10-Leads, Body 1.30x1.60mm, Pitch 0.40mm, IPC Medium Density"
  rect 0.5x0.2 smd: 1(-0.625,0.2) 2(-0.625,-0.2) 6(0.625,-0.2) 7(0.625,0.2)
  rect 0.2x0.5 smd: 3(-0.4,-0.775) 4(0,-0.775) 5(0.4,-0.775) 8(0.4,0.775) 9(0,0.775) 10(-0.4,0.775)
  silkscreen extent -1.2,-0.95 0.65,1, body extent -0.67,-0.82 0.67,0.82, height 0.6
QFN65P300X300X100_HS-9N [mm] "QFN, 8-Leads, Body 3.00x3.00mm, Pitch 0.65mm, Thermal Pad 1.55x2.40mm, IPC Medium Density"
  rect 0.65x0.35 smd: 1(-1.55,0.975) 2(-1.55,0.325) 3(-1.55,-0.325) 4(-1.55,-0.975) 5(1.55,-0.975) 6(1.55,-0.325) 7(1.55,0.325) 8(1.55,0.975)
  rect 1.55x2.4 smd: 9(0,0)
  silkscreen extent -2.43,-1.65 1.65,1.65, body extent -1.5,-1.5 1.5,1.5, height 1
QFN65P400X400X100_HS-17N [mm] "QFN, 16-Leads, Body 4.00x4.00mm, Pitch 0.65mm, Thermal Pad 2.65x2.65mm, IPC Medium Density"
  oval 0.8x0.3 smd: 1(-1.925,0.975) 2(-1.925,0.325) 3(-1.925,-0.325) 4(-1.925,-0.975) 9(1.925,-0.975) 10(1.925,-0.325) 11(1.925,0.325) 12(1.925,0.975)
  oval 0.3x0.8 smd: 5(-0.975,-1.925) 6(-0.325,-1.925) 7(0.325,-1.925) 8(0.975,-1.925) 13(0.975,1.925) 14(0.325,1.925) 15(-0.325,1.925) 16(-0.975,1.925)
  rect 2.65x2.65 smd: 17(0,0)
  silkscreen extent -2.93,-2.15 2.15,2.15, body extent -2.05,-2.05 2.05,2.05, height 1
RESC1508X04N [mm] "Chip Resistor, 2-Leads, Body 1.55x0.80mm, IPC Medium Density"
  rect 0.65x0.9 smd: 1(-0.725,0) 2(0.725,0)
  body extent -0.85,-0.48 0.85,0.48, height 0.45
SOIC127P600X173-8N [mm] "SOIC, 8-Leads, Body 4.89x3.90mm, Pitch 1.27mm, IPC Medium Density"
  oval 1.55x0.6 smd: 1(-2.7,1.905) 2(-2.7,0.635) 3(-2.7,-0.635) 4(-2.7,-1.905) 5(2.7,-1.905) 6(2.7,-0.635) 7(2.7,0.635) 8(2.7,1.905)
  silkscreen extent -2.82,-2.5 1.6,2.88, body extent -3,-2.5 3,2.5, height 1.73
SOIC127P600X175-8N [mm] "SOIC, 8-Leads, Body 4.90x3.90mm, Pitch 1.27mm, IPC Medium Density"
  rect 1.55x0.6 smd: 1(-2.7,1.905) 2(-2.7,0.635) 3(-2.7,-0.635) 4(-2.7,-1.905) 5(2.7,-1.905) 6(2.7,-0.635) 7(2.7,0.635) 8(2.7,1.905)
  silkscreen extent -2.82,-2.5 1.6,2.88, body extent -3,-2.5 3,2.5, height 1.75
SOT95P280X145-6N [mm] "SOT23, 6-Leads, Body 2.90x2.80mm, Pitch 0.95mm, IPC Medium Density"
  rect 1x0.6 smd: 1(-1.35,0.95) 2(-1.35,0) 3(-1.35,-0.95) 4(1.35,-0.95) 5(1.35,0) 6(1.35,0.95)
  silkscreen extent -1.47,-1.5 0.45,1.92, body extent -1.5,-1.5 1.5,1.5, height 1.45

## Part data
C1 C2 C3 C4 C5 C6 C7 C8 C10 C11 C12 C13 C14 C15 C16 C17 C18 C19 C20 C21: library part "CAP CER 10uF 10% 75V 1210", "10µF ±10% 75V Condensateurs céramique X7R 1210 (3225 métrique)", Supplier Part Number 1=445-181658-1-ND, Supplier 1=Digi-Key
C9 C23 C27 C35: library part "CAP CER 100nF 10% 10V 0603", "0,1µF ±10% 10V Condensateurs céramique X7R 0603 (1608 métrique)", Supplier Part Number 1=399-1095-1-ND, Supplier 1=Digi-Key
C22 C25 C32 C33 C40 C41: library part "CAP CER 1nF 10% 10V 0603", "1nF ±10% 10V Condensateurs céramique X7R 0603 (1608 métrique)", Supplier Part Number 1=399-8984-1-ND, Supplier 1=Digi-Key
C24 C26 C28 C34 C36 C42: library part "CAP CER 1uF 10% 16V 0603", "1µF ±10% 16V Condensateurs céramique X7R 0603 (1608 métrique)", Supplier Part Number 1=399-7847-1-ND, Supplier 1=Digi-Key
C29 C31 C37 C39: library part "CAP CER 47nF 10% 10V 0603", "47nF ±10% 10V Condensateurs céramique X7R 0603 (1608 métrique)", Supplier Part Number 1=80-C0603C473K8R, Supplier 1=Mouser
C30 C38: library part "CAP CER 4.7nF 10% 10V 0603", "4,7nF ±10% 10V Condensateurs céramique X7R 0603 (1608 métrique)", Supplier Part Number 1=399-9092-1-ND, Supplier 1=Digi-Key
C43 C44: library part "CAP CER 22uF 20% 6V3 0603", "22µF ±20% 6,3V Condensateurs céramique X5R 0603 (1608 métrique)", Supplier Part Number 1=399-14498-1-ND, Supplier 1=Digi-Key
D1 D2 D3: "Diode Schottky 100V 1A Montage en surface CFP3", Supplier Part Number 1=1727-2394-1-ND, Supplier 1=Digi-Key
J1: library part "CONNECT 2pos 90° 3.81mm", "2 Positions, bloc de jonction Embase, broche mâle, gainée (4 côtés) 0,150 po (3,81mm) 90°, engle droit Trou traversant", Supplier Part Number 1=277-2315-1-ND, Supplier 1=Digi-Key, Use="Power Supply 10..48V"
J2: library part "CONNECT 3pos 90° 3.81mm", "3 Positions, bloc de jonction Embase, broche mâle, gainée (4 côtés) 0,150 po (3,81mm) 90°, engle droit Trou traversant", Supplier Part Number 1=277-2316-1-ND, Supplier 1=Digi-Key, Use=Motor
L1: Current="5.9A max", DCR="DCR 12.5m", size="Size 1008"
Q1 Q2 Q3 Q4 Q5 Q6: library part "MOSFET N-CH 80V 86A/136A 8DFN", "Canal N 80V 86A (Ta), 136A (Tc) 51W (Ta), 127W (Tc) Montage en surface 8-DFN (5,1x6,15)", Supplier Part Number 1=488-NTMFSC004N08MCCT-ND, Supplier 1=Digi-Key
R1 R5 R14 R23: library part "RES SMD 18K OHM 1% 1/10W 0603", "18 kOhms ±1% 0,1W, 1/10W Pavé résistif 0603 (1608 métrique) AutomobileAEC-Q200 Couche épaisse", Supplier Part Number 1=RMCF0603FT18K0CT-ND, Supplier 1=Digi-Key
R2 R7 R13 R17 R21 R26: library part "RES SMD 1K OHM 1% 1/10W 0603", "1 kOhms ±1% 0,1W, 1/10W Pavé résistif 0603 (1608 métrique) AutomobileAEC-Q200 Couche épaisse", Supplier Part Number 1=RMCF0603FT1K00CT-ND, Supplier 1=Digi-Key
R3 R6 R10 R15 R20 R24: library part "RES SMD 5.6 OHM 1% 1/10W 0603", "5,6 Ohms ±1% 0,1W, 1/10W Pavé résistif 0603 (1608 métrique) AutomobileAEC-Q200 Couche épaisse", Supplier Part Number 1=738-RMCF0603FT5R60TR-ND, Supplier 1=DigiKey
R4 R8 R11 R16 R22 R25: library part "RES SMD 220 OHM 1% 1/10W 0603", "220 Ohms ±1% 0,1W, 1/10W Pavé résistif 0603 (1608 métrique) AutomobileAEC-Q200 Couche épaisse", Supplier Part Number 1=RMCF0603FT220RCT-ND, Supplier 1=Digi-Key
R9 R18: library part "RES SMD 20K OHM 1% 1/10W 0603", "20 kOhms ±1% 0,1W, 1/10W Pavé résistif 0603 (1608 métrique) AutomobileAEC-Q200 Couche épaisse", Supplier Part Number 1=RMCF0603FT20K0CT-ND, Supplier 1=Digi-Key
R12 R19: library part "RES SMD 10K OHM 1% 1/10W 0603", "10 kOhms ±1% 0,1W, 1/10W Pavé résistif 0603 (1608 métrique) AutomobileAEC-Q200 Couche épaisse", Supplier Part Number 1=RMCF0603FT10K0CT-ND, Supplier 1=Digi-Key
U1: library part "SENSOR DIGITAL -40C-150C SOT23-6", "Capteur de température Numérique, local -40°C ~ 150°C 13 b SOT-23-6", Supplier Part Number 1=ADT7301ARTZ-REEL7CT-ND, Supplier 1=Digi-Key
U2: "FET Operational Amplifier", ComponentLink1Description="Manufacturer Link", ComponentLink1URL=http://www.analog.com/
U3 U4 U7 U9 U11 U12: library part "DGTL ISO 2.5KV GATE DRIVER 8SOIC", "2.5A Gate Driver Capacitive Coupling 2500Vrms 1 Channel 8SOIC", Supplier Part Number 1=66AH7002, Supplier 1=Newark
U5: "Amplificateurs opérationnels - Amplis-Op Dual 20MHz OP Auto-cal E temp", ComponentLink1Description="Manufacturer Link", ComponentLink1URL=http://www.analog.com/
U6: library part "IC SWITCH DUAL SPDT 10LFCSP", "2 Circuits, circuit intégré, commutateur 2:1 850mOhms 10-LFCSP-UQ (1,6x1,3)"
U8 U10: library part "IC CURRENT SENSOR P&P 8SOIC", "Current Sensor 20A 1 Channel Hall Effect Bidirectional 8-SOIC (0.154\", 3.90mm Width)", Supplier Part Number 1=413-MLX91221KDC-ABF-025-SP-ND, Supplier 1=Digi-Key
X3: library part "CONNECT SMD 16pos 180° 1.27mm 2row", Supplier Part Number 1=47AC7230, Supplier 1=Newark, system=connector, Use="Power supply convertions"
X4: library part "CONNECT SMD 10pos 180° 1.27mm 2row", Supplier Part Number 1=2053195, Supplier 1=RSComponents, system=connector, Use=Measures

## Free pads (board coordinates)
  round 3.2 hole 2.4: 1(2.2,32.8) 1(9,19.6) 1(34,32.8) 1(42.8,2.2)

## Via types
v1: diameter 0.45, hole 0.2, Top Layer to Bottom Layer, 368 vias
v2: diameter 0.5, hole 0.2, Top Layer to Bottom Layer, 80 vias

## Nets (pads, with @x,y where several pads share a name; then routed paths per layer and width w, separated by ;. In a path a pad name is that pad's centre, name@x,y a point inside that pad or via, vN(x,y) a via of type N, cw(c..) or ccw(c..) an arc to the next point about the centre after c; other vN are vias at no path point)
+3.3VA: C23.2 C27.2 C43.2 C44.2 L1.2 U2.3 U5.8 | length 5.6
  Top Layer w0.25: U2.3@23.1,3.55 v2(23.105,3.55) ; v1(36.906,10.432) 37.024,10.55 U5.8@38.706,10.55
  Bottom Layer w0.25: C43.2@6.9,31.7 C44.2@6.9,33.2 7.2,33.5 v1(9,33.5)
  other v1: 21.925,6.6
+3.3VD: C9.2 C29.2 C35.2 C37.2 U1.3 U3.2 U4.2 U6.6 U7.2 U8.8 U9.2 U10.8 U11.2 U12.2 X3.4 | length 23.7
  Top Layer w0.25: U6.6@40.3,7.325 40.3,7.554 40.446,7.7 v1(41.227,7.7)
  Bottom Layer w0.25: X3.4@1.8,21.27 2.704,21.27 2.925,21.049 2.925,19.479 2.146,18.7 v2(2.1,18.7) ; C9.2@22.875,30.8 22.905,30.77 22.905,30.147 23.1,29.952 U1.3@23.1,29.2 30.665,29.2 v1(32.565,31.1) ; C29.2@40.2,22.475 39.246,22.475 39.1,22.621 v1(39.1,24.75) 39.1,26.879 39.246,27.025 C37.2@40.2,27.025
  other v1: 38.669,3.55 2.765,10 8.665,10 14.565,10 20.565,10 26.565,10 32.565,10 43,16.8 43,28.895
+3.3VDA: L1.1 X3.5 | length 14.3
  Top Layer w0.25: v1(5.9,22.54) 7.095,22.54 7.435,22.2 10.1,22.2 10.396,22.496 10.396,27.608 9,29.004 v2(9,31.5)
+12V: C26.2 C34.2 C42.2 D1.2 D2.2 D3.2 U4.8 U9.8 U12.8 X3.3 | length 11.1
  Top Layer w0.2: v2(13.281,15.4) U9.8@13.295,15.4
  Bottom Layer w0.25: v2(5.6,18.7) 4.85,19.45 4.85,19.463 4.775,19.538 4.775,21.124 4.921,21.27 X3.3@5.9,21.27
  Bottom Layer w0.5: D1.2@1.95,13.8 1.495,14.255 v2(1.495,15.4) C26.2@2.675,15.4 ; D2.2@13.75,13.8 13.4,14.15 13.4,14.641 13.281,14.76 v2(13.281,15.4) C34.2@14.475,15.4 ; v1(31.3,15.4) C42.2@32.475,15.4
  other v1: 28.7,13.8
AGND: C23.1 C27.1 C30.1 C31.1 C32.1 C38.1 C39.1 C40.1 C43.1 C44.1 U2.11 U2.17 U5.4 U8.5 U10.5 X3.6 | length 13.3
  Top Layer w0.25: v1(40.831,16.025) 41.568,16.025 ; U5.4@41.806,12.5 41.806,13.5 41.556,13.75 41.556,16.013 41.568,16.025 ; C32.1@42.306,16.025 41.568,16.025
  Bottom Layer w0.25: v1(5.3,31.7) C44.1@5.3,33.2 ; C30.1@41.7,23.925 41.7,23.346 41.554,23.2 41.071,23.2 40.925,23.054 40.925,21.65 41.97,20.605 U8.5@43,20.605 ; U10.5@43,32.705 v1(44.354,32.705)
  other v1: 19.25,2.9 20.475,6.6 36.906,8.982 42.45,24.75
  other v2: 20.625,2.675 21.725,2.675 20.625,3.775 21.725,3.775 1.8,22.54
DGND: C1.1 C2.1 C3.1 C4.1 C5.1 C6.1 C7.1 C8.1 C9.1 C10.1 C11.1 C12.1 C13.1 C14.1 C15.1 C16.1 C17.1 C18.1 C19.1 C20.1 C21.1 C22.1 C25.1 C26.1 C29.1 C33.1 C34.1 C35.1 C37.1 C41.1 C42.1 J1.1 Q4.1 Q4.2 Q4.3 Q5.1 Q5.2 Q5.3 Q6.1 Q6.2 Q6.3 R2.1 R7.1 R17.1 R26.1 U1.1 U4.5 U6.10 U9.5 U12.5 X3.2 X3.7 X3.8 | length 28.4
  Top Layer w0.25: v1(12.3,1.1) 12.354,1.1 12.679,1.425 C41.1@13.6,1.425 R26.1@15.1,1.425 ; v1(12.3,6.5) 12.825,5.975 R17.1@15.1,5.975 ; v2(27.2,1.475) C22.1@28.7,1.475 ; v2(27.2,6.025) 27.3,5.925 C25.1@28.7,5.925 ; v1(38.3,6.2) 38.354,6.2 38.454,6.3 U6.10@39.325,6.3
  Bottom Layer w0.2: C42.1@33.925,15.4 C42.1@33.925,15.403
  Bottom Layer w0.25: v2(1.2,18.7) 1.8,19.3 X3.2@1.8,20 ; v2(9.9,29.6) 10.368,29.132 21.132,29.132 U1.1@21.2,29.2 21.2,29.952 21.37,30.121 21.37,30.745 C9.1@21.425,30.8
  Bottom Layer w0.5: C26.1@4.125,15.4 v2(5.305,15.4) ; C34.1@15.925,15.4 v1(17.1,15.4) ; C42.1@33.925,15.4 v1(35.1,15.4)
  other v1: 2.775,1.1 24.2,1.1 33.835,1.4 2.775,1.7 12.3,1.7 24.2,1.7 33.835,2 36.2,2 2.775,2.3 12.3,2.3 24.2,2.3 33.835,2.6 36.2,2.6 38.6,2.6 39.1,2.6 2.775,2.9 12.3,2.9 33.835,3.2 2.775,3.5 12.3,3.5 24.2,3.55 37.219,3.55 2.775,4.1 12.3,4.1 2.775,4.7 12.3,4.7 33.835,4.825 2.775,5.3 12.3,5.3 33.835,5.425 2.775,5.9 12.3,5.9 33.835,6.025 2.775,6.5 33.835,6.625 24.2,7.6 24.2,8.2 24.2,8.8 24.2,9.4 24.2,10 24.2,10.6 11.5,18.804 12.8,18.804 14.1,18.804 18.9,18.8 20.2,18.804 21.5,18.8 26.3,18.804 27.6,18.809 28.9,18.804 12.8,19.404 20.2,19.404 27.6,19.409 11.5,19.454 14.1,19.454 18.9,19.45 21.5,19.45 26.3,19.454 28.9,19.454 11.5,20.004 12.8,20.004 14.1,20.004 18.9,20 20.2,20.004 21.5,20 26.3,20.004 27.6,20.009 28.9,20.004 8.3,23.6 40.2,24.75
  other v2: 7.6,23 8.3,23 9,23 9.7,23 7.6,23.6 9,23.6 9.7,23.6 1.8,23.81 5.9,23.81 7.6,24.2 8.3,24.2 9,24.2 9.7,24.2
GAIN_MES_I: U6.4 U6.5 X3.15 | length 72
  Top Layer w0.25: v2(8.575,17.2) 8.623,17.248 9.19,17.248 9.643,17.7 10.775,17.7 12.227,16.248 12.3,16.175 12.3,12.046 12.446,11.9 12.55,11.9 24.173,11.9 24.198,11.875 32.225,11.875 33.26,10.84 33.26,4.321 33.406,4.175 34.133,4.175 35.505,2.803 35.505,1.543 35.651,1.396 40.029,1.396 40.175,1.543 40.175,3.541 v1(41.734,5.1) ; U6.4@40.875,6.7 41.472,6.7 v2@41.722,6.95 ; U6.5@40.875,7.1 41.517,7.1 41.667,6.95 v2@41.722,6.95 ; v2(41.734,6.95) v2@41.722,6.95
  Bottom Layer w0.25: X3.15@5.9,28.89 9.114,28.89 10.474,27.531 10.547,27.457 10.547,27.349 10.362,22.362 9.75,21.75 8.172,21.75 7.056,21 7.056,18.995 v2(8.575,17.2) ; v1(41.734,5.1) v2(41.734,6.95)
"Gate V High": Q2.4 R10.2 | length 14.9
  Top Layer w0.25: v2(21.925,17.2) 22.735,17.2 23.557,18.022 24.954,18.022 25.1,18.169 25.1,27.658 24.954,27.804 Q2.4@23.405,27.804
  Bottom Layer w0.25: v2(21.925,17.2) R10.2@22.025,17.2
"Gate V Low": Q5.4 R15.2 | length 9.3
  Bottom Layer w0.25: R15.2@17.325,17.2 17.325,16.596 17.471,16.45 21.11,16.45 21.257,16.596 21.257,17.919 21.403,18.065 22.97,18.065 23.405,18.5 v1(23.405,19.404)
"Gate W High": Q3.4 R20.2 | length 27.7
  Top Layer w0.25: v1(28.025,17.2) 31.8,17.2 34.7,20.1 34.7,21.519 35.081,21.9 36.36,21.9 37.985,23.525 39.454,23.525 39.6,23.671 39.6,26.479 39.454,26.625 35.121,26.625 34.925,26.821 34.925,27.658 34.779,27.804 Q3.4@30.805,27.804
"Gate W Low": Q6.4 R24.2 | length 3.7
  Bottom Layer w0.25: v1(30.805,19.404) 30.805,17.346 30.951,17.2 R24.2@32.375,17.2
NetC22_2: C22.2 R1.2 R2.2 U2.2 | length 5.6
  Top Layer w0.25: U2.2@23.1,2.9 25.675,2.9 R1.2@25.7,2.875 R2.2@27.2,2.875 C22.2@28.7,2.875
NetC24_1: C24.1 Q1.1 Q1.2 Q1.3 Q4.5 Q4.6 Q4.7 Q4.8 R23.1 U3.5 U10.3 U10.4 | length 24.2
  Top Layer w0.25: v2(9.3,6.2) 9.3,0.8 9.5,0.6 16.454,0.6 16.6,0.746 R23.1@16.6,1.425
  Bottom Layer w0.25: v2(9.3,6.2) 9.3,13.676 10.025,14.401 C24.1@10.025,15.4
  Bottom Layer w0.5: C24.1@10.025,15.4 v1(11.205,15.4)
  other v1: 11.5,21.5 12.8,21.5 14.1,21.5 15.4,21.5 16.7,21.5 11.5,22.4 12.8,22.4 14.1,22.4 15.4,22.4 16.7,22.4 11.5,23.3 12.8,23.3 14.1,23.3 15.4,23.3 16.7,23.3 11.5,24.2 12.8,24.2 14.1,24.2 15.4,24.2 16.7,24.2 11.5,25.1 12.8,25.1 14.1,25.1 15.4,25.1 16.7,25.1 11.5,26 12.8,26 14.1,26 15.4,26 16.7,26 11.5,27.1 12.8,27.1 14.1,27.1 11.5,28 12.8,28 14.1,28 36.2,31.414 36.895,31.414 37.595,31.414 38.295,31.414 36.2,32.014 36.895,32.014 37.595,32.014 36.895,32.614 37.595,32.614
NetC24_2: C24.2 D1.1 U3.8 | length 4.4
  Bottom Layer w0.5: D1.1@4.85,13.8 6.45,15.4 v1(7.395,15.4) C24.2@8.575,15.4
NetC25_2: C25.2 R5.2 R7.2 U2.4 | length 5.7
  Top Layer w0.25: U2.4@23.1,4.2 24.1,4.2 24.375,4.475 R5.2@25.7,4.475 C25.2@28.7,4.475
NetC28_2: C28.2 D2.1 U7.8 | length 5
  Bottom Layer w0.5: D2.1@16.65,13.8 16.7,13.75 17.407,13.75 17.7,14.043 17.7,14.8 18.3,15.4 v1(19.3,15.4) C28.2@20.475,15.4
NetC30_2: C30.2 R12.1 U8.6 | length 15.7
  Top Layer w0.25: R12.1@43.806,12.625 43.806,13.243 44.184,13.622 v2(44.189,13.622)
  Bottom Layer w0.25: C30.2@41.7,22.475 41.7,22 42,21.7 43.954,21.7 44.1,21.554 44.1,19.481 43.954,19.335 U8.6@43,19.335 42.146,19.335 41.95,19.139 41.95,16.271 42.096,16.125 43.229,16.125 44.189,15.165 v2(44.189,13.622)
NetC31_2: C31.2 R13.1 U8.7 | length 9.4
  Top Layer w0.25: v1(43,18.065) 43.8,17.265 43.8,16.031 R13.1@43.806,16.025
  Bottom Layer w0.25: v1(43,18.065) 44.354,18.065 44.5,18.211 44.5,22.329 44.354,22.475 C31.2@43.2,22.475
NetC32_2: C32.2 R13.2 U5.3 | length 4.8
  Top Layer w0.25: U5.3@41.806,11.85 42.259,11.85 42.406,11.996 42.406,13.243 42.306,13.343 C32.2@42.306,14.575 R13.2@43.806,14.575
NetC33_2: C33.2 R14.2 R17.2 U2.10 | length 6.2
  Top Layer w0.25: C33.2@13.6,4.525 15.1,4.525 15.15,4.475 16.55,4.475 16.6,4.425 17.425,4.425 17.7,4.15 17.7,3.893 18.043,3.55 U2.10@19.25,3.55
NetC36_2: C36.2 D3.1 U11.8 | length 3
  Bottom Layer w0.5: D3.1@25.75,13.8 25.593,13.957 25.593,14.8 25.3,15.093 v1(25.3,15.4) C36.2@26.475,15.4
NetC38_2: C38.2 R19.1 U10.6 | length 26.8
  Top Layer w0.25: R19.1@36.906,13.325 36.906,14.081 38.606,15.781 38.606,16.464 38.767,16.625 39.45,16.625 40.025,17.2 40.807,17.2 41.366,17.2 41.556,17.389 41.556,18.442 42.079,18.965 43.929,18.965 44.075,19.111 44.075,26.879 43.929,27.025 v2(43.2,27.025)
  Bottom Layer w0.25: U10.6@43,31.435 44.354,31.435 44.5,31.289 44.5,27.171 44.354,27.025 v2(43.2,27.025)
NetC39_2: C39.2 R21.1 U10.7 | length 26.3
  Top Layer w0.25: R21.1@39.331,16.025 39.959,16.025 40.106,16.171 40.106,16.654 40.252,16.8 41.532,16.8 41.956,17.224 41.956,18.276 42.245,18.565 44.354,18.565 44.5,18.711 44.5,29.854 44.189,30.165 v2(43,30.165)
  Bottom Layer w0.25: C39.2@41.7,27.025 41.7,27.904 41.846,28.05 43.9,28.05 44.1,28.25 44.1,29.952 43.954,30.098 43.067,30.098 v2(43,30.165)
NetC40_2: C40.2 R21.2 U5.5 | length 3.9
  Top Layer w0.25: U5.5@38.706,12.5 38.706,12.532 38.688,12.55 38.688,13.303 39.006,13.622 39.006,14.375 39.206,14.575 C40.2@40.831,14.575
NetC41_2: C41.2 R23.2 R26.2 U2.12 | length 6.1
  Top Layer w0.25: C41.2@13.6,2.875 R26.2@15.1,2.875 R23.2@16.6,2.875 17.554,2.875 17.7,2.729 17.7,2.446 17.896,2.25 U2.12@19.25,2.25
NetJ2_1: J2.1 U10.1 U10.2
  other v1: 36.9,28.9 37.6,28.9 38.3,28.9 36.9,29.5 37.6,29.5 38.3,29.5 36.9,30.1 37.6,30.1 38.3,30.1